# Altium PCB CANLink_V2.PcbDoc (part 1 of 3)
Units mm, origin at the board's own origin, x right, y up, seen from the top; angles counter-clockwise.
Board outline 75 x 56 mm, 2 copper layers (Top Layer, Bottom Layer); 205 components, 140 nets, 648 pads, 309 vias.
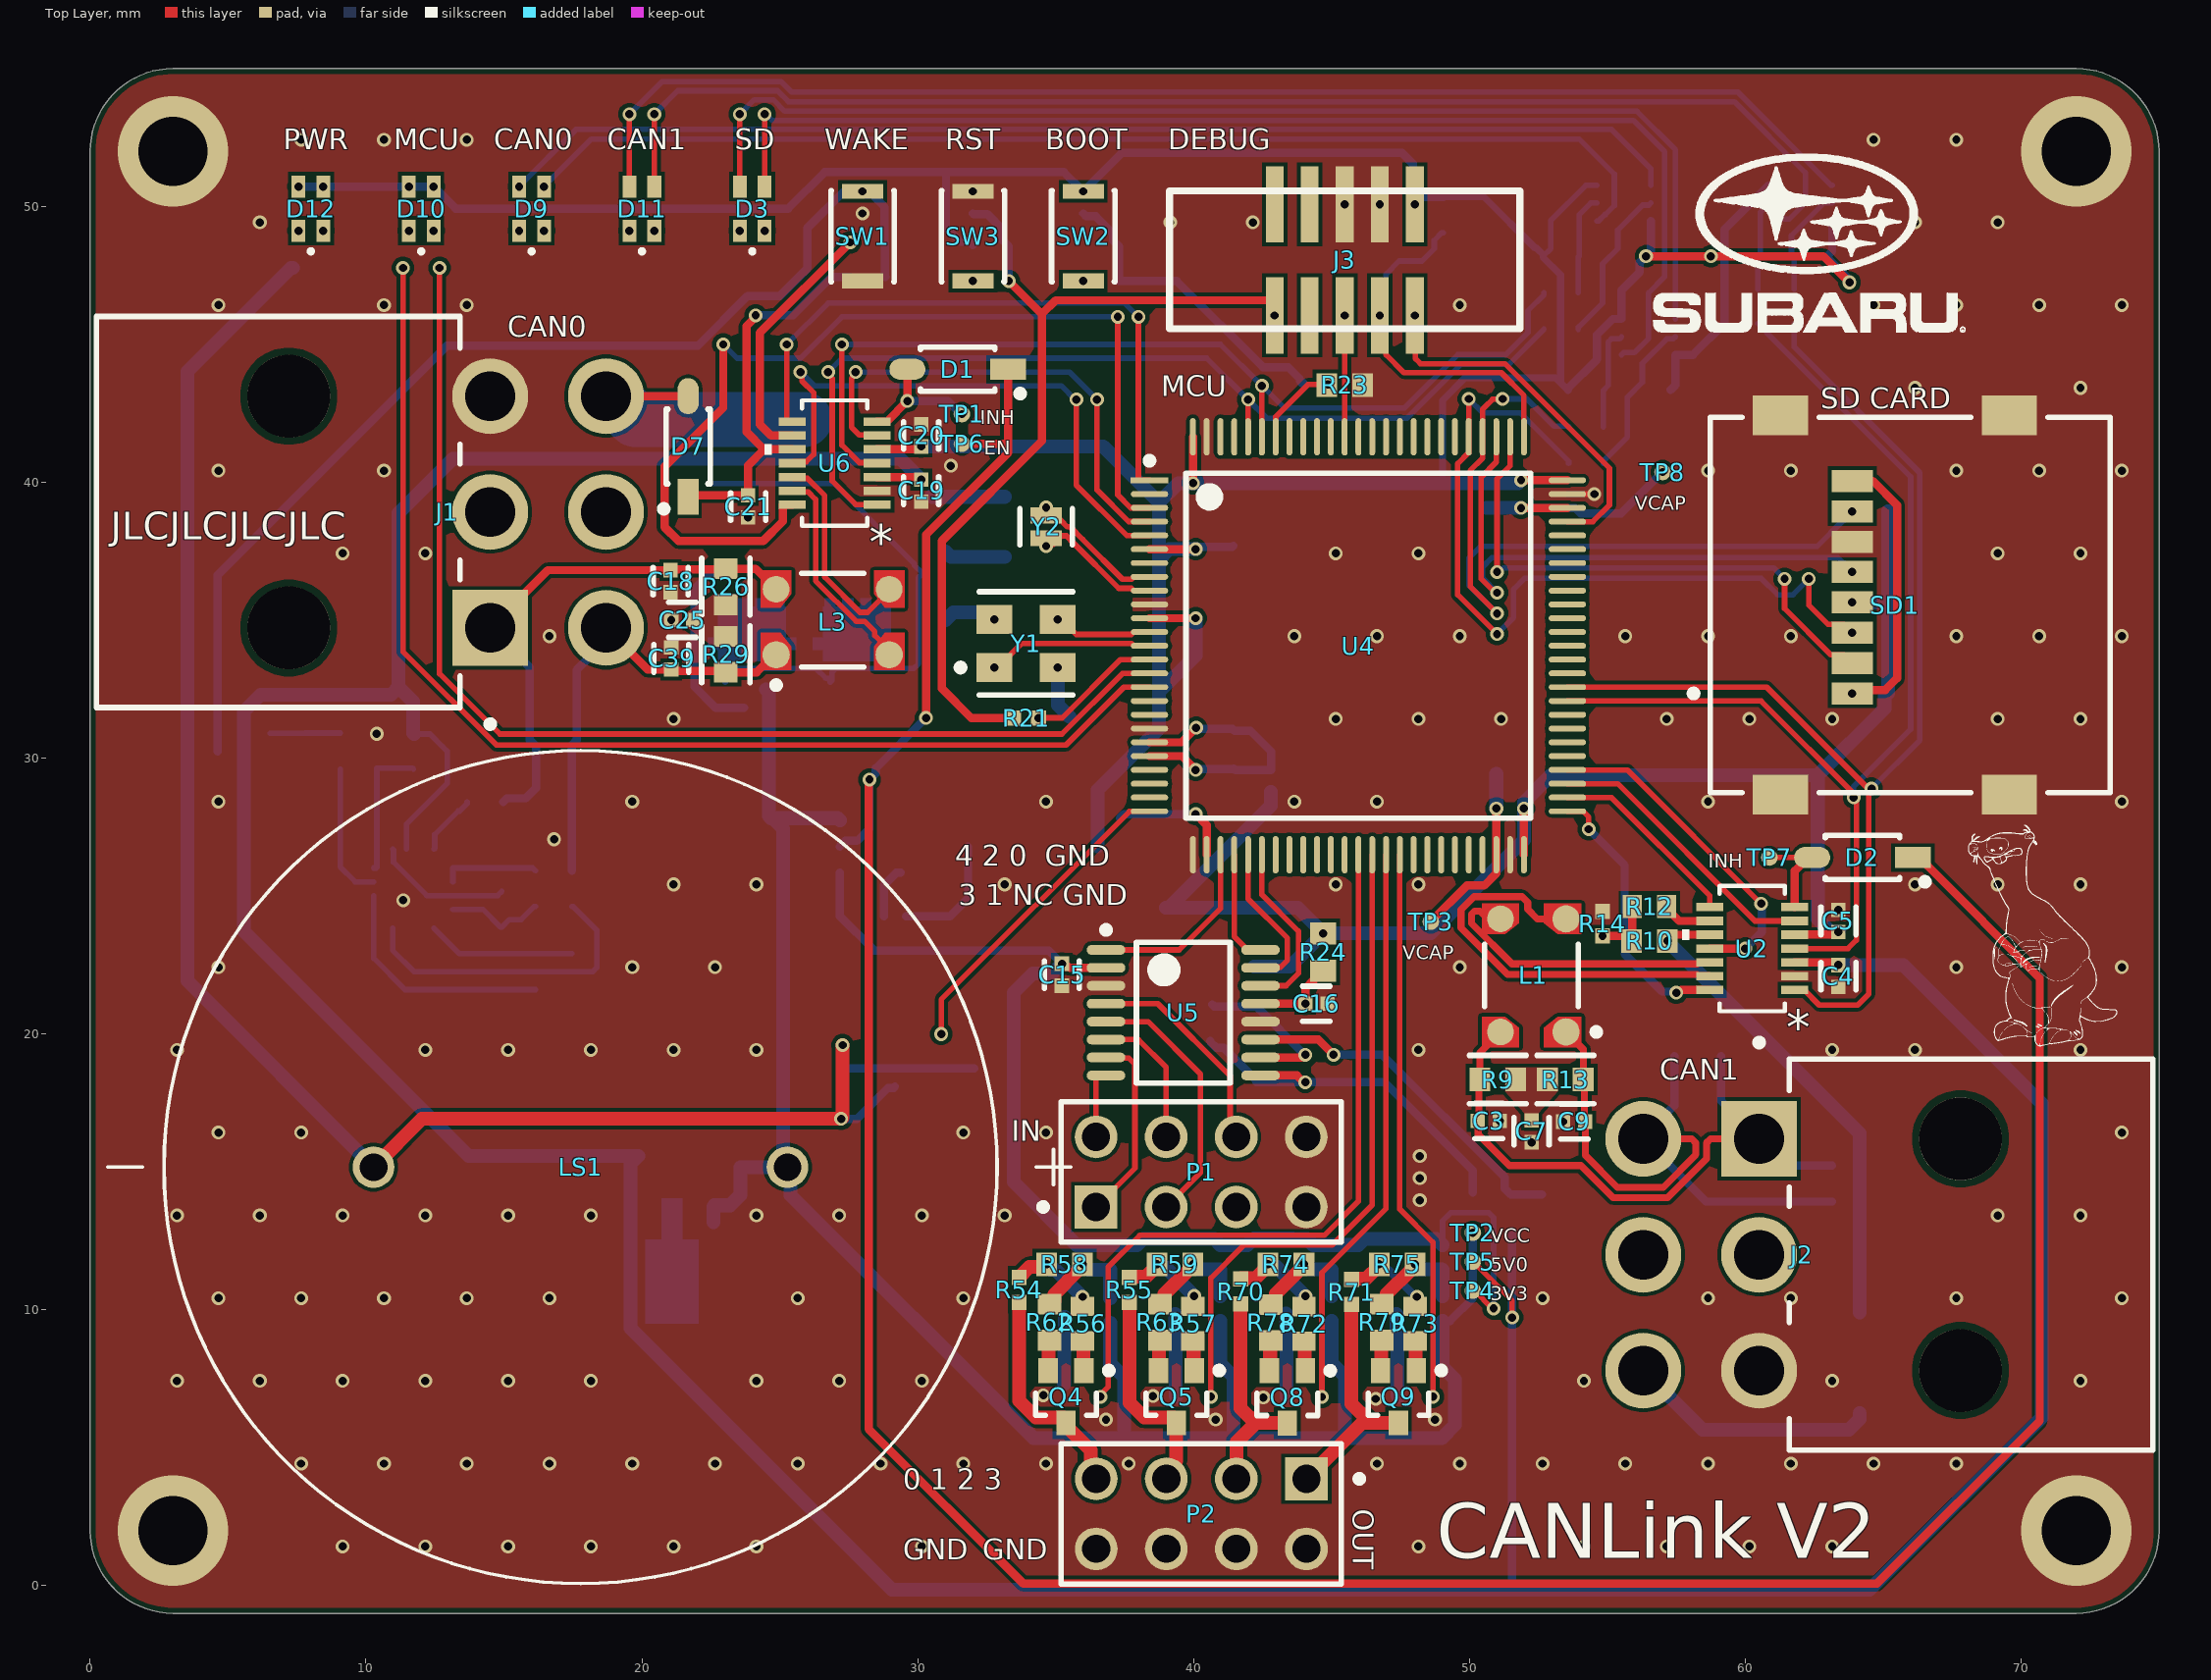
[diagram p0: Top Layer view]
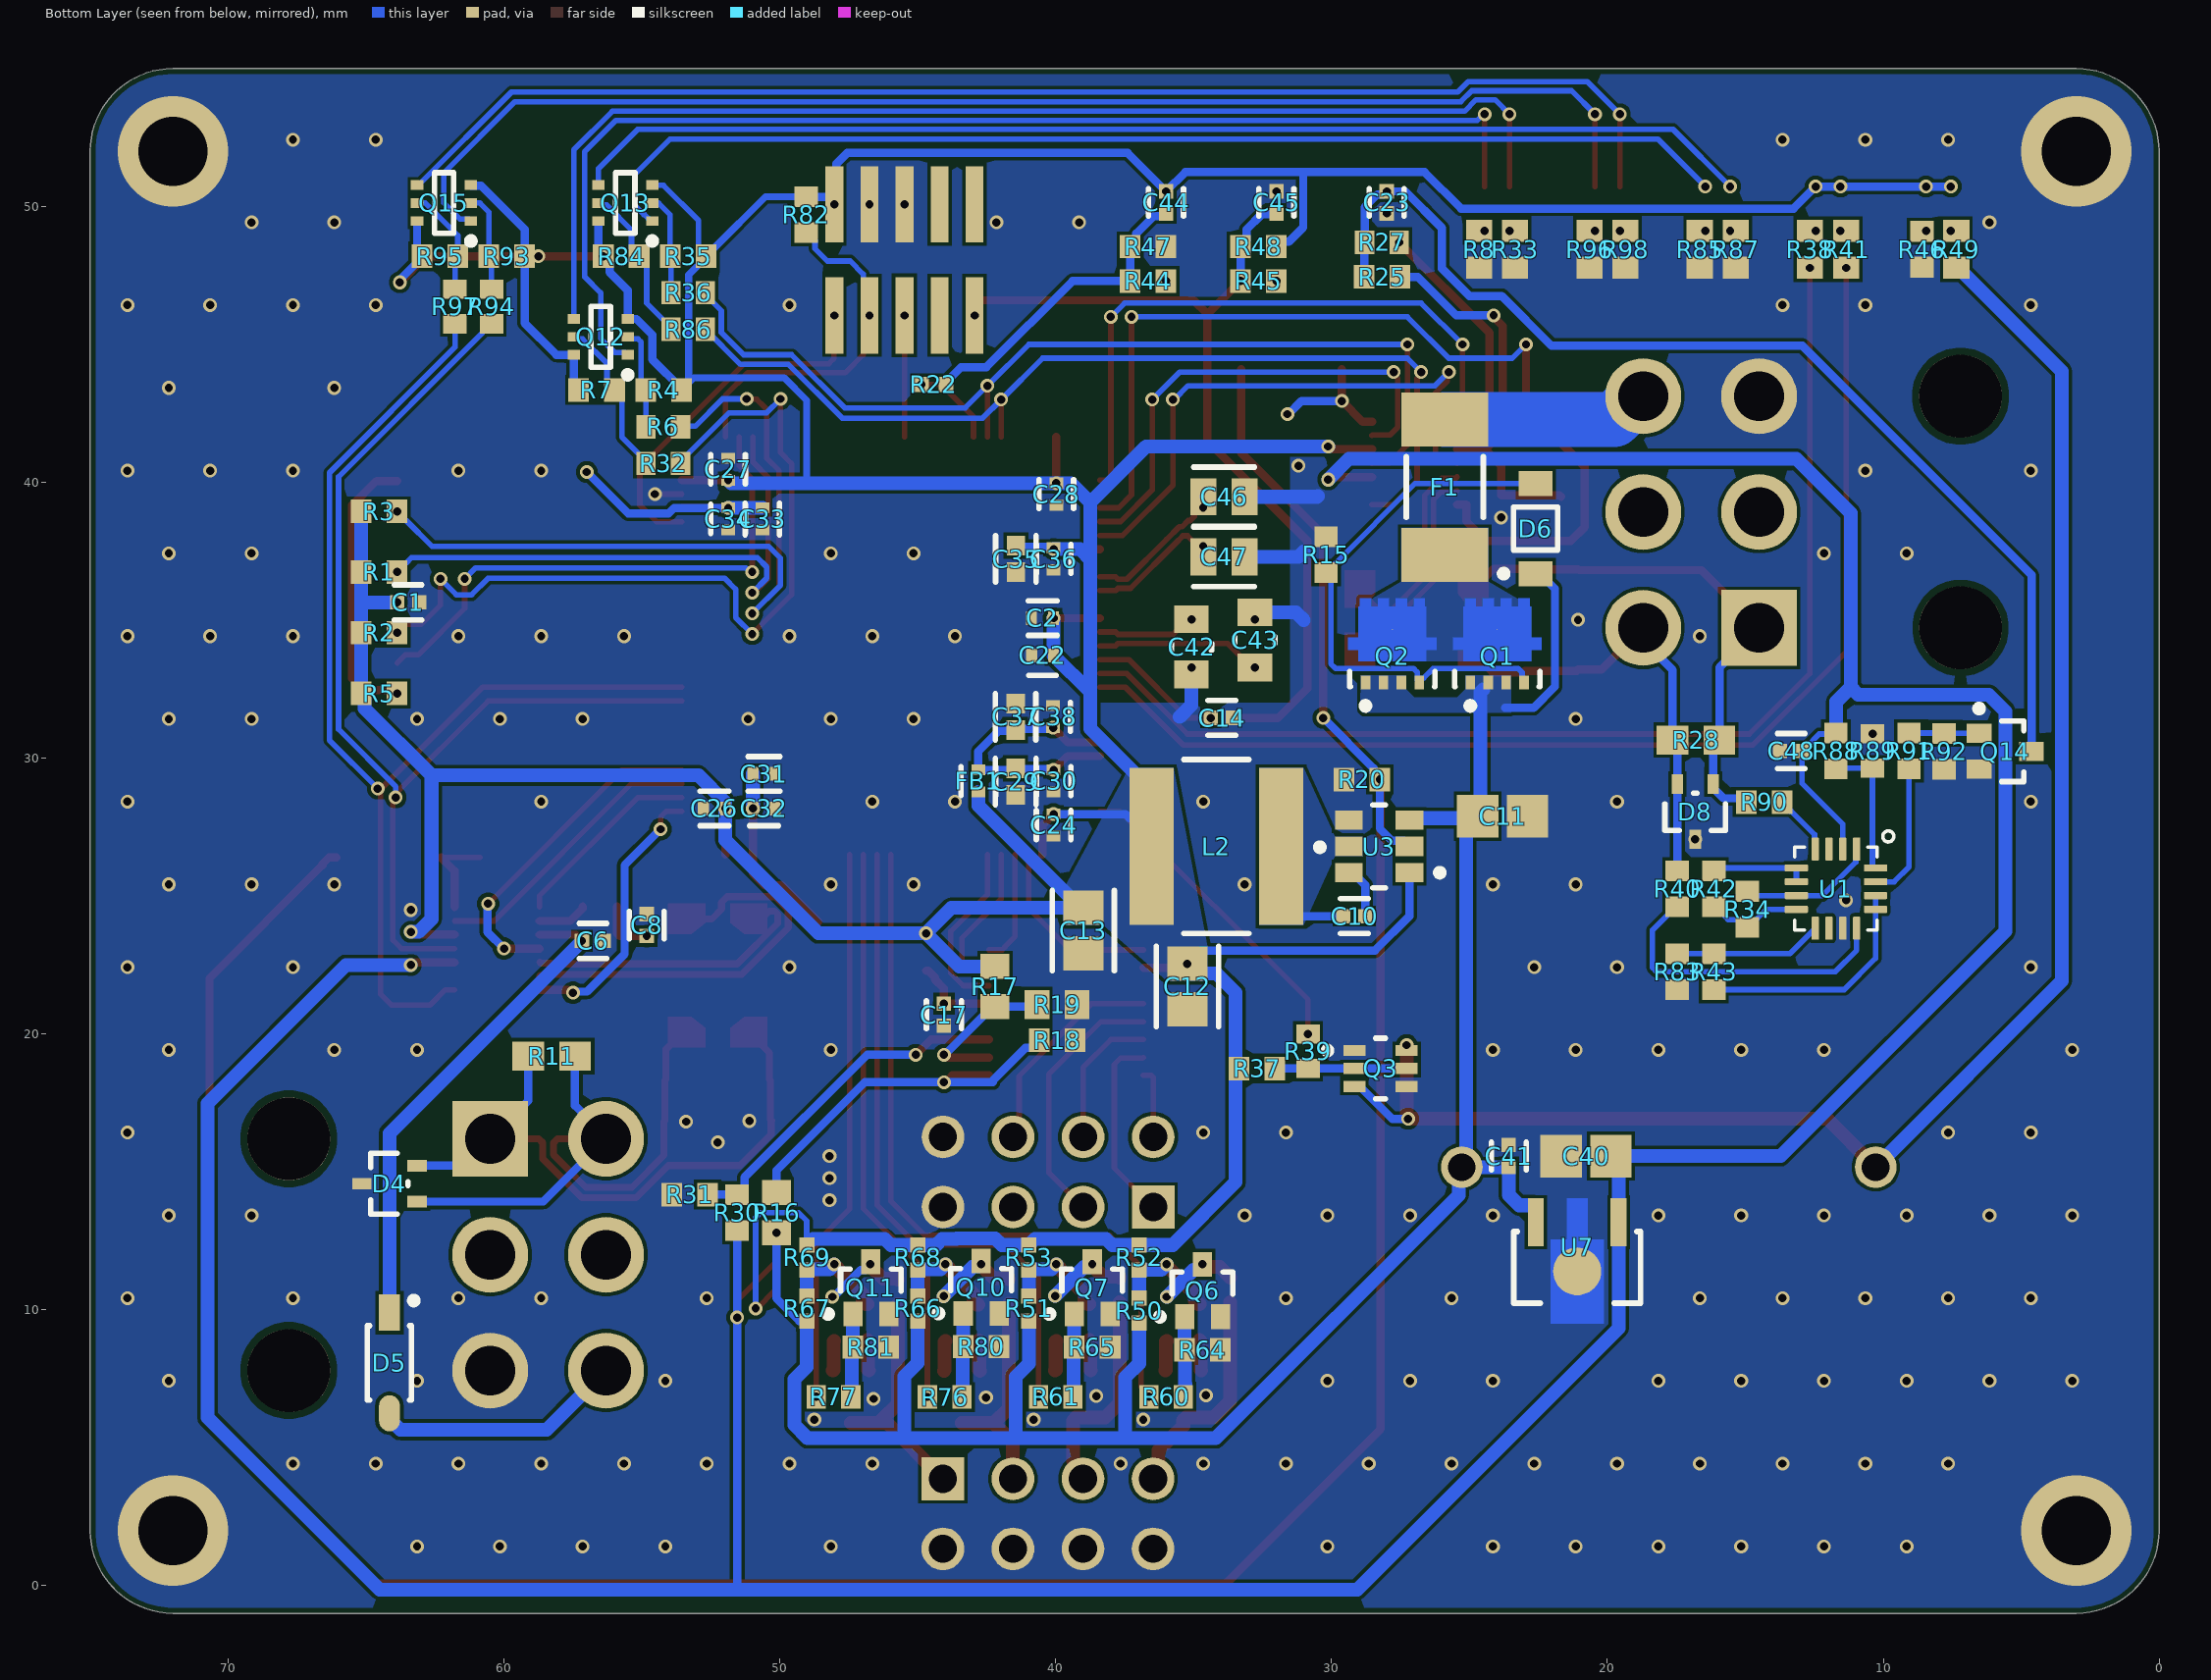
[diagram p1: Bottom Layer view, seen from below]
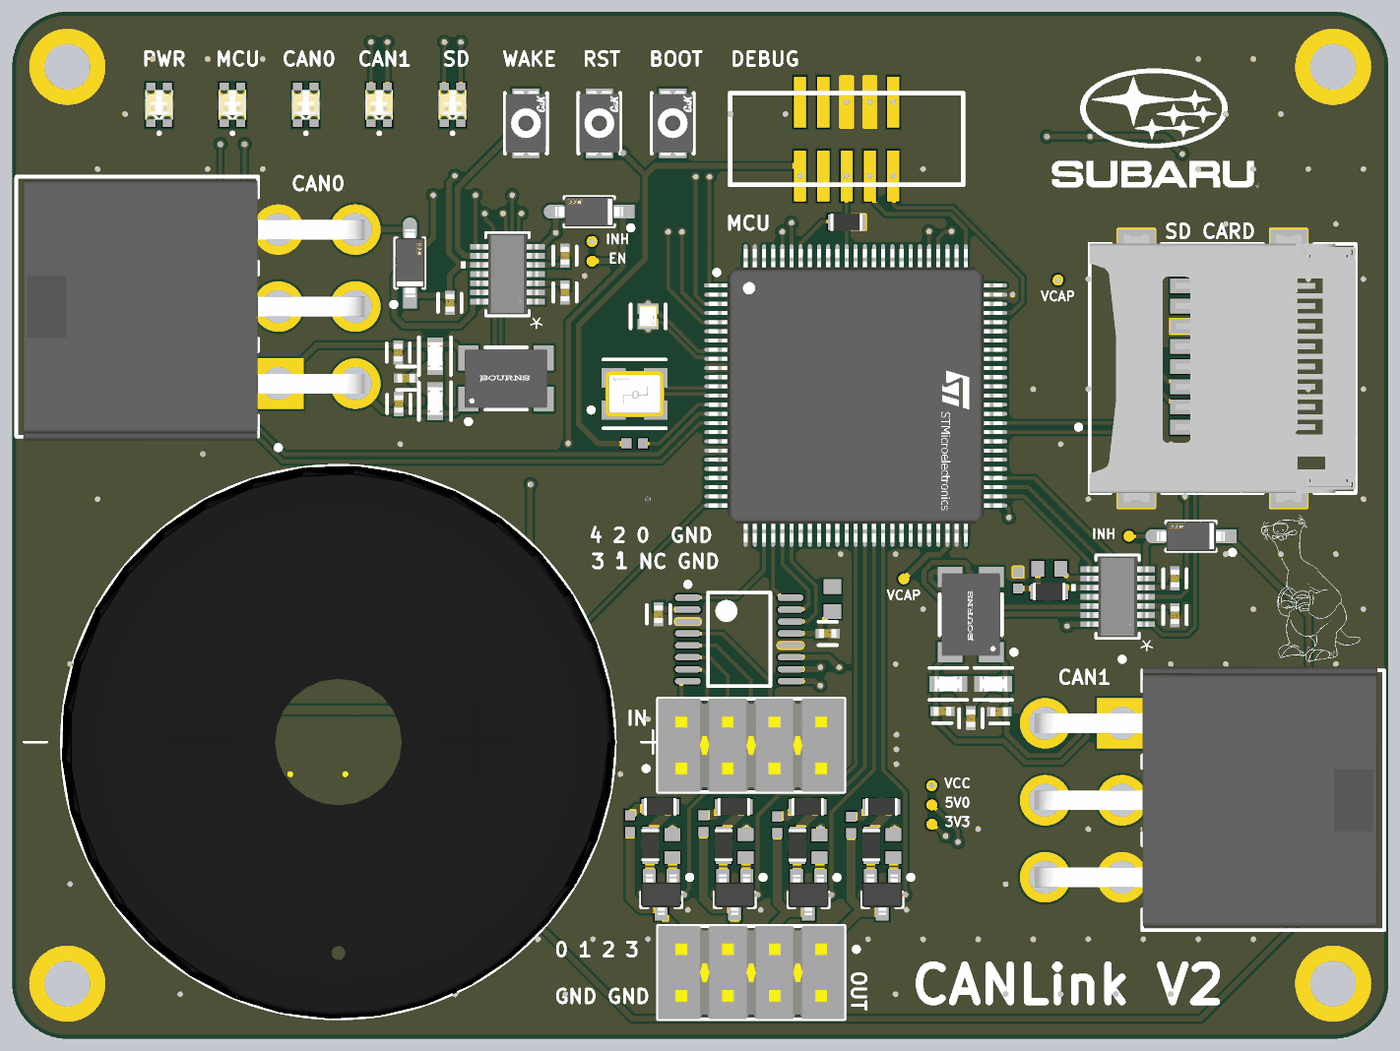
[diagram p3: 3D render of the assembled board from above, using the file's embedded part models]
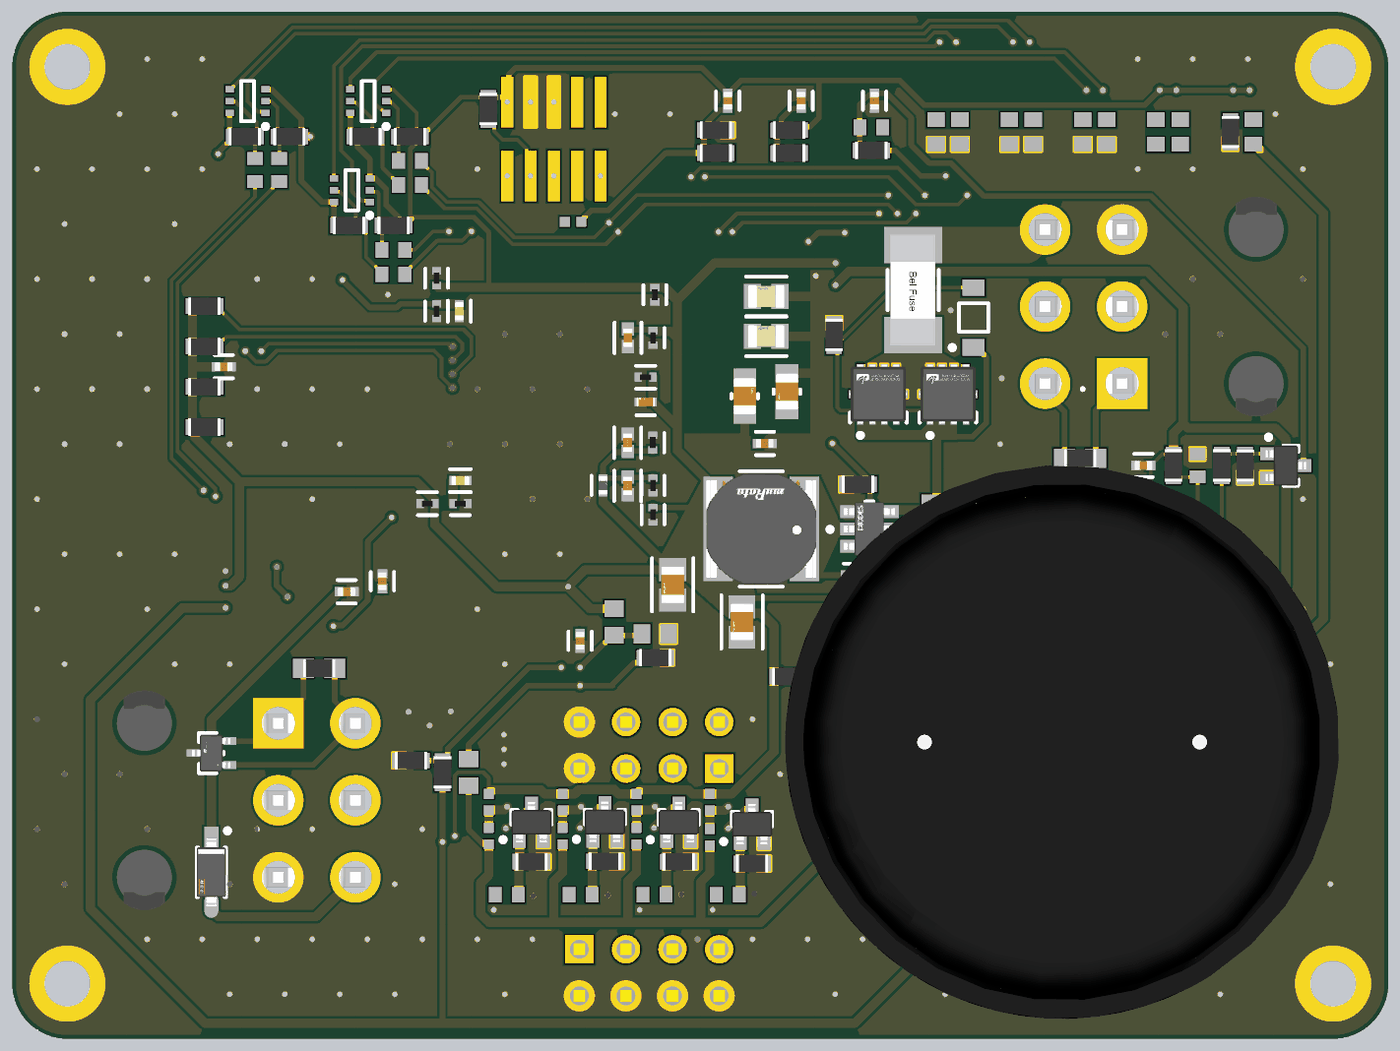
[diagram p4: 3D render of the assembled board from below, using the file's embedded part models]

## Layer stack, top to bottom
Top Solder: solder mask 0.0102, Solder Resist, Dk 3.5
Top Layer: signal copper 0.0356
Dielectric 1: dielectric 0.32, FR-4, Dk 4.8
Bottom Layer: signal copper 0.0356
Bottom Solder: solder mask 0.0102, Solder Resist, Dk 3.5

## Board outline
3,-1 cw(c3,2) 0,2 0,52 cw(c3,52) 3,55 72,55 cw(c72,52) 75,52 75,2 cw(c72,2) 72,-1

## Design rules (kind name [scope] priority, off if disabled: settings)
BoardOutlineClearance [All] p1: gap=0.2 ignorepadtopadclearanceinfootprint=FALSE
Clearance [All] p1: gap=0.127 ignorepadtopadclearanceinfootprint=FALSE except(0.25: Arc-Hole Track-Hole SMDPad-Hole THPad-Hole Via-Hole Fill-Hole Poly-Hole Region-Hole Text-Hole)
ComponentClearance [All] p1: gap=0.127 collisioncheckmode=3 verticalgap=0.127 showdistances=TRUE
DiffPairsRouting [All] p1: maxlimit=0.254 minlimit=0.127 mostfreqgap=0.127 toplayer_minwidth=0.127 toplayer_maxwidth=25.4 toplayer_prefwidth=0.127 bottomlayer_minwidth=0.127 bottomlayer_maxwidth=25.4 bottomlayer_prefwidth=0.127 maxuncoupledlength=12.7
Height [All] p1: minheight=0 maxheight=1816.048 prefheight=12.7
HoleSize [All] p1: absolutevalues=TRUE maxlimit=6.3 minlimit=0.3 maxpercent=80.000 minpercent=20.000
HoleToHoleClearance [All] p1: gap=0.25 allowstackedmicrovias=FALSE
MinimumAnnularRing [All] p1: minimumring=0.076
MinimumSolderMaskSliver [All] p1: minsoldermaskwidth=0
PlaneClearance [All] p1: clearance=0.127
PlaneConnect PlaneConnectPowerPads [InPadClass('PowerPads')] p1: planeconnectstyle=Direct reliefexpansion=0.508 reliefentries=4 reliefconductorwidth=0.254 reliefairgap=0.254
PlaneConnect [All] p2: pad.planeconnectstyle=Relief pad.reliefexpansion=0.3 pad.reliefentries=4 pad.reliefconductorwidth=0.127 pad.reliefairgap=0.127 via.planeconnectstyle=Direct via.reliefexpansion=0.3 via.reliefentries=4 via.reliefconductorwidth=0.127 via.reliefairgap=0.127
PolygonConnect PolygonConnectPowerPads [All vs (InPadClass('PowerPads'))] p1: connectstyle=Direct reliefconductorwidth=0.254 reliefentries=4 polygonreliefangle="90 Angle" airgapwidth=0.254
PolygonConnect [All] p2: connectstyle=Direct reliefconductorwidth=0.127 reliefentries=4 polygonreliefangle="90 Angle" airgapwidth=0.127
RoutingVias [All] p1: holewidth=0.3 width=0.5 viastyle="Through Hole" minholewidth=0.3 minwidth=0.6 maxholewidth=0.6 maxwidth=6.6
SilkToSilkClearance [All] p1: silktosilkclearance=0
SilkToSolderMaskClearance [IsPad] p1: minsilkscreentomaskgap=0.127 clearancetoexposedcopper=TRUE
SolderMaskExpansion [All] p1: expansion=0.075 istentingtop=FALSE
Width [All] p1: maxlimit=25.4 minlimit=0.127 preferedwidth=0.127 minimp=50.000000 maximp=50.000000 favimp=50.000000
20 further rules are at their usual default settings.

## Classes and differential pairs
net class 120DIFF: CAN0_N CAN0_P CAN1_N CAN1_P PRE_CAN1_N PRE_CAN1_P PRE_CAN_N PRE_CAN_P
component class SWITCHES: Q4 Q5 Q6 Q7 Q8 Q9 Q10 Q11 R50 R51 R52 R53 R54 R55 R56 R57 R58 R59 R60 R61 R62 R63 R64 R65 R66 R67 R68 R69 R70 R71 R72 R73 R74 R75 R76 R77 R78 R79 R80 R81
component class SD_0: C1 R1 R2 R3 R5 SD1
component class PWR_MGMT: C10 C11 C12 C13 D6 F1 L2 Q1 Q2 R15 R16 R17 R18 R19 R20 U3
component class MCU_0: C2 C14 C15 C16 C17 C18 C19 C20 C21 C22 C23 C24 C25 C26 C27 C28 C29 C30 C31 C32 C33 C34 C35 C36 C37 C38 C39 C40 C41 C42 C43 C44 C45 C46 C47 C48 D3 D7 D8 D9 D10 D11 D12 FB1 J3 L3 LS1 Q3 Q12 Q13 Q14 Q15 R4 R6 R7 R8 R21 R22 R23 R24 R25 R26 R27 R28 R29 R30 R31 R32 R33 R34 R35 R36 R37 R38 R39 R40 R41 R42 R43 R44 R45 R46 R47 R48 R49 R82 R83 R84 R85 R86 R87 R88 R89 R90 R91 R92 R93 R94 R95 R96 R97 R98 SW1 SW2 SW3 TP3 TP8 U1 U4 U5 U6 U7 Y1 Y2
component class CANLink: D1 D2 J1 J2 P1 P2 TP1 TP2 TP4 TP5 TP6 TP7
component class CAN_1: C3 C4 C5 C6 C7 C8 C9 D4 D5 L1 R9 R10 R11 R12 R13 R14 U2
differential pair PRE_CAN: +PRE_CAN_P -PRE_CAN_N
differential pair PRE_CAN1: +PRE_CAN1_P -PRE_CAN1_N
differential pair X: +X_P -X_N
differential pair X32: +X32_P -X32_N
differential pair CAN1: +CAN1_P -CAN1_N
differential pair CAN0: +CAN0_P -CAN0_N

## Components (designator, comment, footprint, x,y, rotation, side; value= is the part's Value field where it differs from the comment)
C1 "C0402C104K8PACTU" FP-C0402-BB-MFG 63.475,35.648 r180 bottom value="0.10 μF"
C2 "GRM155R71C104KA88D" FP-GRM15-MFG 40.477,35.075 r180 bottom value=0.10μF
C3 "C0402C104K8PACTU" FP-C0402-BB-MFG 50.7,16.85 r0 top value="0.10 μF"
C4 "C0402C104K8PACTU" FP-C0402-BB-MFG 63.375,22.1 r90 top value="0.10 μF"
C5 "C0402C104K8PACTU" FP-C0402-BB-MFG 63.375,24.1 r270 top value="0.10 μF"
C6 "C0402C104K8PACTU" FP-C0402-BB-MFG 56.775,23.375 r0 bottom value="0.10 μF"
C7 "C0402C104K8PACTU" FP-C0402-BB-MFG 52.25,16.475 r270 top value="0.10 μF"
C8 "C0402C104K8PACTU" FP-C0402-BB-MFG 54.825,23.95 r270 bottom value="0.10 μF"
C9 "C0402C104K8PACTU" FP-C0402-BB-MFG 53.8,16.825 r0 top value="0.10 μF"
C10 "C0402C104K8PACTU" FP-C0402-BB-MFG 29.175,24.275 r0 bottom value="0.10 μF"
C11 "C0805C225K9PACTU" CAPC2013X145X50ML20T25 23.8,27.9 r0 bottom
C12 "GRM21BR61E226ME44L" FP-GRM21B-0_2-e0_2_0_7-IPC_B 35.225,21.724 r270 bottom
C13 "GRM21BR61E226ME44L" FP-GRM21B-0_2-e0_2_0_7-IPC_B 39,23.75 r270 bottom
C14 "C0402C104K8PACTU" FP-C0402-BB-MFG 33.975,31.462 r180 bottom value="0.10 μF"
C15 "C0402C104K8PACTU" FP-C0402-BB-MFG 35.225,22.15 r270 top value="0.10 μF"
C16 "C0402C104K8PACTU" FP-C0402-BB-MFG 44.45,21.1 r0 top value="0.10 μF"
C17 "C0402C104K8PACTU" FP-C0402-BB-MFG 44.05,20.7 r270 bottom value="0.10 μF"
C18 "C0402C104K8PACTU" FP-C0402-BB-MFG 21.04,36.417 r270 top value="0.10 μF"
C19 "C0402C104K8PACTU" FP-C0402-BB-MFG 30.125,39.7 r90 top value="0.10 μF"
C20 "C0402C104K8PACTU" FP-C0402-BB-MFG 30.125,41.7 r270 top value="0.10 μF"
C21 "C0402C104K8PACTU" FP-C0402-BB-MFG 23.85,39.125 r90 top value="0.10 μF"
C22 "C1005X5R1A475K050BC" FP-C1005-050-0_15-MFG 40.475,33.725 r0 bottom
C23 "C0402C104K8PACTU" FP-C0402-BB-MFG 28,50.15 r90 bottom value="0.10 μF"
C24 "GRM155R71C104KA88D" FP-GRM15-MFG 40.075,27.575 r90 bottom value=0.10μF
C25 "C0402C104K8PACTU" FP-C0402-BB-MFG 21.465,35.017 r180 top value="0.10 μF"
C26 "GRM155R71C104KA88D" FP-GRM15-MFG 52.375,28.177 r180 bottom value=0.10μF
C27 "GRM155R71C104KA88D" FP-GRM15-MFG 51.873,40.475 r270 bottom value=0.10μF
C28 "GRM155R71C104KA88D" FP-GRM15-MFG 39.975,39.573 r90 bottom value=0.10μF
C29 "EMK105BJ105KV-F" FP-0402-L_1_0_0_05-W_0_5-IPC_A 41.452,29.15 r270 bottom
C30 "GRM155R71C104KA88D" FP-GRM15-MFG 40.077,29.175 r90 bottom value=0.10μF
C31 "C1005X7S1A225K050BC" FP-C1005-050-0_15-0_1-MFG 50.575,29.434 r0 bottom
C32 "GRM155R71C104KA88D" FP-GRM15-MFG 50.575,28.177 r0 bottom value=0.10μF
C33 "C1005X7S1A225K050BC" FP-C1005-050-0_15-0_1-MFG 50.634,38.674 r90 bottom
C34 "GRM155R71C104KA88D" FP-GRM15-MFG 51.873,38.675 r90 bottom value=0.10μF
C35 "EMK105BJ105KV-F" FP-0402-L_1_0_0_05-W_0_5-IPC_A 41.441,37.226 r270 bottom
C36 "GRM155R71C104KA88D" FP-GRM15-MFG 40.077,37.225 r90 bottom value=0.10μF
C37 "EMK105BJ105KV-F" FP-0402-L_1_0_0_05-W_0_5-IPC_A 41.454,31.5 r90 bottom
C38 "GRM155R71C104KA88D" FP-GRM15-MFG 40.09,31.504 r270 bottom value=0.10μF
C39 "C0402C104K8PACTU" FP-C0402-BB-MFG 21.065,33.617 r270 top value="0.10 μF"
C40 "C0805C225K9PACTU" CAPC2013X145X50ML20T25 20.775,15.575 r180 bottom
C41 "C0402C104K8PACTU" FP-C0402-BB-MFG 23.575,15.575 r270 bottom value="0.10 μF"
C42 "08051A6R8CAT2A" FP-0805-L_2_01_0_2-W_1_25-MFG 35.075,34.037 r90 bottom
C43 "08051A6R8CAT2A" FP-0805-L_2_01_0_2-W_1_25-MFG 32.775,34.287 r270 bottom
C44 "C0402C104K8PACTU" FP-C0402-BB-MFG 36,50.15 r90 bottom value="0.10 μF"
C45 "C0402C104K8PACTU" FP-C0402-BB-MFG 32,50.15 r90 bottom value="0.10 μF"
C46 "C0805C180J5GACTU" FP-C0805C-DN-MFG 33.9,39.478 r180 bottom value="18 pF"
C47 "C0805C180J5GACTU" FP-C0805C-DN-MFG 33.9,37.303 r180 bottom value="18 pF"
C48 "C0402C104K8PACTU" FP-C0402-BB-MFG 13.34,30.26 r0 bottom value="0.10 μF"
D1 "1N4148W-TP" FP-SOD-123-IPC_A 31.45,44.1 r180 top
D2 "1N4148W-TP" FP-SOD-123-IPC_A 64.25,26.4 r180 top
D3 "150066RG54050" WL-SBCD_0606 24,49.925 r180 top
D4 "ESDCAN02-2BWY" FP-SOT323-3L-MFG 64.15,14.575 r0 bottom value=3pF
D5 "1N4148W-TP" FP-SOD-123-IPC_A 64.15,8.075 r270 bottom
D6 "MMSZ5242BT1G" ONSC-SOD-123-2-425-04_V 22.6,38.325 r90 bottom
D7 "1N4148W-TP" FP-SOD-123-IPC_A 21.675,41.3 r90 top
D8 "ESDCAN02-2BWY" FP-SOT323-3L-MFG 16.815,28.06 r270 bottom value=3pF
D9 "150066RG54050" WL-SBCD_0606 16,49.925 r180 top
D10 "150066RG54050" WL-SBCD_0606 12,49.925 r180 top
D11 "150066RG54050" WL-SBCD_0606 20,49.925 r180 top
D12 "150066RG54050" WL-SBCD_0606 8,49.925 r180 top
F1 "0679L1000-05" FP-0679L-MFG 25.894,39.827 r270 bottom value=0.0038Ω
FB1 "BLM15PX601SN1D" FP-BLM15-0_05-MFG 42.802,29.175 r90 bottom
J1 "455580003" FP-455580003-MFG 7,38.925 r90 top
J2 "455580003" FP-455580003-MFG 68,12 r270 top
J3 "HYDRA_PROGRAMMING_HEADER" 3220-10-0300-00-Footprint-1 48.02,46.05 r180 top
L1 "SRF4532-510Y" FP-SRF4532-MFG 52.25,22.125 r90 top
L2 "1255AY-3R9N=P3" FP-DG6045C-MFG 34.175,26.8 r0 bottom
L3 "SRF4532-510Y" FP-SRF4532-MFG 26.915,35 r0 top
LS1 "AI-3035-TT-12V-R" AI-3035-TT-12V-R-Footprint-1 17.775,15.175 r180 top
P1 "TSW-104-08-L-D" SMTC-TSW-104-08-L-D_V 40.275,15 r0 top
P2 "TSW-104-08-L-D" SMTC-TSW-104-08-L-D_V 40.28,2.605 r180 top
Q1 "SISH615ADN-T1-GE3" SISH615ADN-T1-GE3-Footprint-1 24.032,34.149 r180 bottom
Q2 "SISH615ADN-T1-GE3" SISH615ADN-T1-GE3-Footprint-1 27.832,34.149 r180 bottom
Q3 "SSM6N7002KFU,LF" FP-SSOP6-P-0_65A-MFG 28.225,18.75 r180 bottom
Q4 "DMG1013UW-7" DIOD-SOT323-3_V 35.375,6.85 r270 top
Q5 "DMG1013UW-7" DIOD-SOT323-3_V 39.375,6.85 r270 top
Q6 "BSS138W-7-F" DIOD-SOT323-3_V 34.675,10.7 r90 bottom
Q7 "BSS138W-7-F" DIOD-SOT323-3_V 38.675,10.8 r90 bottom
Q8 "DMG1013UW-7" DIOD-SOT323-3_V 43.4,6.844 r270 top
Q9 "DMG1013UW-7" DIOD-SOT323-3_V 47.425,6.85 r270 top
Q10 "BSS138W-7-F" DIOD-SOT323-3_V 42.7,10.819 r90 bottom
Q11 "BSS138W-7-F" DIOD-SOT323-3_V 46.7,10.8 r90 bottom
Q12 "BSS84AKS,115" NXP-SOT363_L 56.491,45.275 r0 bottom
Q13 "BSS84AKS,115" NXP-SOT363_L 55.6,50.125 r0 bottom
Q14 "BSS138W-7-F" DIOD-SOT323-3_V 5.575,30.25 r180 bottom
Q15 "BSS84AKS,115" NXP-SOT363_L 62.175,50.125 r0 bottom
R1 "ERJ3EKF1002V" RESC1609X55X30LL15T15 64.525,36.748 r0 bottom
R2 "ERJ3EKF1002V" RESC1609X55X30LL15T15 64.525,34.548 r0 bottom
R3 "ERJ3EKF1002V" RESC1609X55X30LL15T15 64.525,38.948 r0 bottom
R4 "ERJ3EKF1002V" RESC1609X55X30LL15T15 54.216,43.35 r180 bottom
R5 "ERJ3EKF1002V" RESC1609X55X30LL15T15 64.525,32.348 r0 bottom
R6 "ERJ-3EKF1001V" RESC1608X55X30LL15T15#1 54.225,42.013 r0 bottom
R7 "ERJ3EKF1002V" RESC1609X55X30LL15T15 56.641,43.35 r0 bottom
R8 "ERJ3EKF56R0V" RESC1608X55X30NL15T15 24.65,48.45 r90 bottom
R9 "ERJ-3EKF60R4V" FP-ERJ3EK-IPC_C 51.025,18.35 r0 top
R10 "ERJ3EKF1002V" RESC1609X55X30LL15T15 56.525,23.375 r180 top
R11 "ERJ-3EKF1200V" RESC1609X55X30ML15T15 58.275,19.2 r180 bottom
R12 "ERJ-3EKF1001V" RESC1608X55X30LL15T15#1 56.525,24.625 r180 top
R13 "ERJ-3EKF60R4V" FP-ERJ3EK-IPC_C 53.475,18.35 r0 top
R14 "0402 JUMPER 0 OHM" RESC1005X40X25NL05T05 54.825,24 r270 top
R15 "ERJ3EKF1002V" RESC1609X55X30LL15T15 30.2,37.375 r90 bottom
R16 "ERJ-3EKF1003V" RESC1608X55X30ML15T15 50.125,13.525 r270 bottom
R17 "ERJ-3EKF1003V" RESC1608X55X30ML15T15 42.2,21.725 r90 bottom
R18 "ERJ3EKF1002V" RESC1609X55X30LL15T15 39.95,19.775 r180 bottom
R19 "ERJ-3EKF1003V" RESC1608X55X30ML15T15 39.95,21.075 r0 bottom
R20 "ERJ3EKF1002V" RESC1609X55X30LL15T15 28.9,29.225 r0 bottom
R21 "0402 JUMPER 0 OHM" RESC1005X40X25NL05T05 33.925,31.462 r180 top
R22 "0402 JUMPER 0 OHM" RESC1005X40X25NL05T05 44.425,43.55 r180 bottom
R23 "ERJ3EKF1002V" RESC1609X55X30LL15T15 45.48,43.525 r180 top
R24 "ERJ3EKF56R0V" RESC1608X55X30NL15T15 44.7,22.975 r270 top
R25 "ERJ3EKF1002V" RESC1609X55X30LL15T15 28.175,47.45 r0 bottom
R26 "ERJ-3EKF60R4V" FP-ERJ3EK-IPC_C 23.04,36.217 r270 top
R27 "ERJ-3EKF1001V" RESC1608X55X30LL15T15#1 28.175,48.7 r0 bottom
R28 "ERJ-3EKF1200V" RESC1609X55X30ML15T15 16.79,30.66 r0 bottom
R29 "ERJ-3EKF60R4V" FP-ERJ3EK-IPC_C 23.04,33.767 r270 top
R30 "ERJ3EKF1002V" RESC1609X55X30LL15T15 51.55,13.525 r270 bottom
R31 "ERJ3EKF1002V" RESC1609X55X30LL15T15 53.275,14.175 r0 bottom
R32 "ERJ-3EKF1001V" RESC1608X55X30LL15T15#1 54.225,40.688 r0 bottom
R33 "ERJ3EKF56R0V" RESC1608X55X30NL15T15 23.35,48.45 r90 bottom
R34 "ERJ3EKF1002V" RESC1609X55X30LL15T15 14.925,24.525 r90 bottom
R35 "ERJ3EKF1002V" RESC1609X55X30LL15T15 53.325,48.2 r180 bottom
R36 "ERJ-3EKF1001V" RESC1608X55X30LL15T15#1 53.325,46.875 r0 bottom
R37 "ERJ3EKF1002V" RESC1609X55X30LL15T15 32.7,18.75 r0 bottom
R38 "ERJ3EKF56R0V" RESC1608X55X30NL15T15 12.664,48.45 r90 bottom
R39 "ERJ-3EKF1001V" RESC1608X55X30LL15T15#1 30.85,19.375 r270 bottom
R40 "ERJ3EKF1002V" RESC1609X55X30LL15T15 17.465,25.27 r270 bottom
R41 "ERJ3EKF56R0V" RESC1608X55X30NL15T15 11.339,48.45 r90 bottom
R42 "ERJ3EKF1002V" RESC1609X55X30LL15T15 16.14,25.27 r270 bottom
R43 "ERJ3EKF1002V" RESC1609X55X30LL15T15 16.14,22.26 r90 bottom
R44 "ERJ-3EKF3300V" RESC1608X55X30LL15T15#2 36.65,47.3 r180 bottom
R45 "ERJ-3EKF3300V" RESC1608X55X30LL15T15#2 32.65,47.3 r180 bottom
R46 "ERJ-3EKF3300V" RESC1608X55X30LL15T15#2 8.6,48.45 r270 bottom
R47 "ERJ3EKF1002V" RESC1609X55X30LL15T15 36.65,48.55 r0 bottom
R48 "ERJ3EKF1002V" RESC1609X55X30LL15T15 32.65,48.55 r0 bottom
R49 "ERJ3EKF56R0V" RESC1608X55X30NL15T15 7.35,48.45 r90 bottom
R50 "0402 JUMPER 0 OHM" RESC1005X40X25NL05T05 36.975,9.975 r90 bottom
R51 "0402 JUMPER 0 OHM" RESC1005X40X25NL05T05 40.975,10.05 r90 bottom
R52 "0402 JUMPER 0 OHM" RESC1005X40X25NL05T05 36.975,11.9 r270 bottom
R53 "0402 JUMPER 0 OHM" RESC1005X40X25NL05T05 40.975,11.9 r270 bottom
R54 "0402 JUMPER 0 OHM" RESC1005X40X25NL05T05 33.675,10.725 r270 top
R55 "0402 JUMPER 0 OHM" RESC1005X40X25NL05T05 37.675,10.725 r270 top
R56 "ERJ-3EKF1001V" RESC1608X55X30LL15T15#1 35.975,9.5 r270 top
R57 "ERJ-3EKF1001V" RESC1608X55X30LL15T15#1 39.975,9.5 r270 top
R58 "ERJ3EKF1002V" RESC1609X55X30LL15T15 35.325,11.65 r0 top
R59 "ERJ3EKF1002V" RESC1609X55X30LL15T15 39.325,11.65 r0 top
R60 "ERJ-3EKF1001V" RESC1608X55X30LL15T15#1 36,6.85 r180 bottom
R61 "ERJ-3EKF1001V" RESC1608X55X30LL15T15#1 40,6.85 r180 bottom
R62 "ERJ3EKF1002V" RESC1609X55X30LL15T15 34.775,9.55 r270 top
R63 "ERJ3EKF1002V" RESC1609X55X30LL15T15 38.775,9.55 r270 top
R64 "ERJ3EKF1002V" RESC1609X55X30LL15T15 34.675,8.55 r0 bottom
R65 "ERJ3EKF1002V" RESC1609X55X30LL15T15 38.675,8.65 r0 bottom
R66 "0402 JUMPER 0 OHM" RESC1005X40X25NL05T05 45,10.05 r90 bottom
R67 "0402 JUMPER 0 OHM" RESC1005X40X25NL05T05 49.025,10.05 r90 bottom
R68 "0402 JUMPER 0 OHM" RESC1005X40X25NL05T05 45,11.9 r270 bottom
R69 "0402 JUMPER 0 OHM" RESC1005X40X25NL05T05 49.025,11.9 r270 bottom
R70 "0402 JUMPER 0 OHM" RESC1005X40X25NL05T05 41.7,10.669 r270 top
R71 "0402 JUMPER 0 OHM" RESC1005X40X25NL05T05 45.725,10.65 r270 top
R72 "ERJ-3EKF1001V" RESC1608X55X30LL15T15#1 44,9.494 r270 top
R73 "ERJ-3EKF1001V" RESC1608X55X30LL15T15#1 48.025,9.5 r270 top
R74 "ERJ3EKF1002V" RESC1609X55X30LL15T15 43.35,11.65 r0 top
R75 "ERJ3EKF1002V" RESC1609X55X30LL15T15 47.375,11.65 r0 top
R76 "ERJ-3EKF1001V" RESC1608X55X30LL15T15#1 44.025,6.844 r180 bottom
R77 "ERJ-3EKF1001V" RESC1608X55X30LL15T15#1 48.05,6.85 r180 bottom
R78 "ERJ3EKF1002V" RESC1609X55X30LL15T15 42.8,9.544 r270 top
R79 "ERJ3EKF1002V" RESC1609X55X30LL15T15 46.825,9.55 r270 top
R80 "ERJ3EKF1002V" RESC1609X55X30LL15T15 42.7,8.669 r0 bottom
R81 "ERJ3EKF1002V" RESC1609X55X30LL15T15 46.7,8.65 r0 bottom
R82 "ERJ3EKF1002V" RESC1609X55X30LL15T15 49.05,49.7 r270 bottom
R83 "ERJ3EKF1002V" RESC1609X55X30LL15T15 17.465,22.26 r270 bottom
R84 "ERJ3EKF1002V" RESC1609X55X30LL15T15 55.75,48.2 r0 bottom
R85 "ERJ3EKF56R0V" RESC1608X55X30NL15T15 16.65,48.45 r90 bottom
R86 "ERJ-3EKF1001V" RESC1608X55X30LL15T15#1 53.325,45.55 r0 bottom
R87 "ERJ3EKF56R0V" RESC1608X55X30NL15T15 15.341,48.45 r90 bottom
R88 "ERJ3EKF1002V" RESC1609X55X30LL15T15 11.715,30.26 r90 bottom
R89 "ERJ-3EKF1001V" RESC1608X55X30LL15T15#1 10.39,30.26 r270 bottom
R90 "ERJ3EKF1002V" RESC1609X55X30LL15T15 14.315,28.41 r180 bottom
R91 "ERJ3EKF1002V" RESC1609X55X30LL15T15 9.065,30.26 r270 bottom
R92 "ERJ3EKF1002V" RESC1609X55X30LL15T15 7.8,30.25 r90 bottom
R93 "ERJ3EKF1002V" RESC1609X55X30LL15T15 59.9,48.2 r180 bottom
R94 "ERJ-3EKF1001V" RESC1608X55X30LL15T15#1 60.45,46.375 r90 bottom
R95 "ERJ3EKF1002V" RESC1609X55X30LL15T15 62.325,48.2 r0 bottom
R96 "ERJ3EKF56R0V" RESC1608X55X30NL15T15 20.65,48.45 r90 bottom
R97 "ERJ-3EKF1001V" RESC1608X55X30LL15T15#1 61.775,46.375 r90 bottom
R98 "ERJ3EKF56R0V" RESC1608X55X30NL15T15 19.35,48.45 r90 bottom
SD1 "47219-2001" MOLX-47219-2001-8_V 65.425,35.553 r90 top
SW1 "KXT331LHS" FP-KXT331LHS-MFG 28,48.925 r90 top
SW2 "KXT331LHS" FP-KXT331LHS-MFG 36,48.925 r90 top
SW3 "KXT331LHS" FP-KXT331LHS-MFG 32,48.925 r90 top
TP1 "TPAD6R" TP06R 31.6,42.475 r90 top
TP2 "TPAD6R" TP06R 50.125,12.8 r90 top
TP3 "TPAD6R" TP06R 48.6,24.075 r90 top
TP4 "TPAD6R" TP06R 50.125,10.7 r90 top
TP5 "TPAD6R" TP06R 50.125,11.75 r90 top
TP6 "TPAD6R" TP06R 31.6,41.4 r90 top
TP7 "TPAD6R" TP06R 60.875,26.4 r90 top
TP8 "TPAD6R" TP06R 57,40.375 r90 top
U1 "LM2902Q4T" LM2902Q4T-Footprint-1 11.715,25.27 r270 bottom
U2 "TCAN1146DYYRQ1" TCAN1146DYYRQ1-Footprint-1 60.25,23.1 r180 top
U3 "AP63203WU-7" FP-TSOT26-MFG 28.275,26.8 r0 bottom
U4 "STM32H730VBT6" FP-LQFP100-1L-IPC_C 45.975,34.075 r0 top
U5 "ADC088S022CIMT/NOPB" MTC16_L 39.625,20.775 r0 top
U6 "TCAN1146DYYRQ1" TCAN1146DYYRQ1-Footprint-1 26.99,40.696 r180 top
U7 "AP7381-50Y-13" FP-SOT89-MFG 21.093,11.541 r0 bottom
Y1 "ABM8-48.000MHZ-B2-T" FP-ABM8-MFG 33.925,34.162 r0 top
Y2 "ECS-.327-12.5-1210-TR" FP-ECX-1210-MFG 34.655,38.39 r270 top

## Footprints (in the part's own frame and the unit in brackets; to place one, negate y for a bottom-side part, rotate by r counter-clockwise, add the part's x,y. Pads: shape width x height; smd on the part's side, far side on the other; paste and mask are expansions set on the pad)
3220-10-0300-00-Footprint-1 [mm]
  rect 0.65x2.77 all layers, no hole: 1(0,-4.03) 2(0,0) 3(1.27,-4.03) 4(1.27,0) 5(2.54,-4.03) 6(2.54,0) 7(3.81,-4.03) 8(3.81,0) 9(5.08,-4.03) 10(5.08,0)
  silkscreen extent -3.81,-4.51 8.89,0.49
AI-3035-TT-12V-R-Footprint-1 [mm]
  round 1.508 hole 1: N(7.5,0) P(-7.5,0)
  silkscreen extent -17.78,-15.1 17.14,15.1, body extent -15.1,-15.1 15.1,15.1, height 2.15
CAPC2013X145X50ML20T25 [mm] "Chip Capacitor, 2-Leads, Body 2.00x1.25mm, IPC Low Density"
  rect 1.5x1.55 smd: 1(-0.9,0) 2(0.9,0)
  body extent -1.1,-0.72 1.1,0.72, height 1.45
DIOD-SOT323-3_V [mm] "SOT323, 3-Leads, Body 2.2x1.35mm, Pitch 0.65mm"
  rect 0.9x0.7 smd: 1(-0.95,0.65) 2(-0.95,-0.65) 3(0.95,0)
  silkscreen extent -1.07,-1.1 0.67,1.68, body extent -1.1,-1.1 1.1,1.1, height 1.07
FP-0402-L_1_0_0_05-W_0_5-IPC_A [mm]
  rect 0.715x0.672 smd paste+0 mask+0: 1(-0.479,0) 2(0.479,0)
  silkscreen extent -0.84,-0.74 0.84,0.74, body extent -0.5,-0.25 0.5,0.25, height 0.55
FP-0679L-MFG [mm]
  rect 1.96x3.15 smd paste+0 mask+0: 1(-2.455,0) 2(2.455,0)
  silkscreen extent -1.1,-1.4 1.1,1.4, body extent -3.05,-1.29 3.05,1.25, height 2.54
FP-0805-L_2_01_0_2-W_1_25-MFG [mm]
  rect 1x1.25 smd paste+0 mask+0: 1(-1,0) 2(1,0)
  silkscreen extent -0.13,-0.72 0.13,0.72, body extent -1,-0.63 1,0.63, height 0.94
FP-455580003-MFG [mm]
  rect 2.75x2.75 hole 1.8 paste-2539.97 mask+0: 1(-4.2,-7.5)
  round 2.75 hole 1.8 paste-2539.97 mask+0: 2(0,-7.5) 3(4.2,-7.5) 4(-4.2,-11.7) 5(0,-11.7) 6(4.2,-11.7)
  round 3 hole 3 unplated paste-2539.97 mask+0: ""(-4.2,-0.2) ""(4.2,-0.2)
  silkscreen extent -7.81,-7.63 7.09,6.78, body extent -7.19,-13.18 7.19,6.88, height 0.25
FP-ABM8-MFG [mm]
  rect 1.3x1.05 smd paste+0 mask+0: 1(-1.15,-0.875) 2(1.15,-0.875) 3(1.15,0.875) 4(-1.15,0.875)
  silkscreen extent -2.5,-1.88 1.7,1.88, body extent -1.9,-1.5 1.9,1.5, height 0.25
FP-BLM15-0_05-MFG [mm]
  rect 0.4x0.5 smd paste+0 mask+0: 1(-0.4,0) 2(0.4,0)
  silkscreen extent -0.53,-0.63 0.52,0.63, body extent -0.5,-0.25 0.5,0.25, height 0.55
FP-C0402-BB-MFG [mm]
  rect 0.52x0.52 smd paste+0 mask+0: 1(-0.4,0) 2(0.4,0)
  silkscreen extent -0.5,-0.64 0.5,0.64, body extent -0.5,-0.25 0.5,0.25, height 0.55
FP-C0805C-DN-MFG [mm]
  rect 0.95x1.35 smd paste+0 mask+0: 1(-0.75,0) 2(0.75,0)
  silkscreen extent -1.1,-1.07 1.1,1.07, body extent -1,-0.63 1,0.63, height 0.88
FP-C1005-050-0_15-0_1-MFG [mm]
  rect 0.4x0.5 smd paste+0 mask+0: 1(-0.4,0) 2(0.4,0)
  silkscreen extent -0.58,-0.63 0.58,0.63, body extent -0.5,-0.25 0.5,0.25, height 0.65
FP-C1005-050-0_15-MFG [mm]
  rect 0.4x0.5 smd paste+0 mask+0: 1(-0.4,0) 2(0.4,0)
  silkscreen extent -0.5,-0.72 0.5,0.72, body extent -0.5,-0.25 0.5,0.25, height 0.55
FP-DG6045C-MFG [mm]
  rect 1.6x5.7 smd paste+0 mask+0: 1(-2.35,0) 2(2.35,0)
  silkscreen extent -3.87,-3.15 1.17,3.15, body extent -3,-3 3,3, height 4.5
FP-ECX-1210-MFG [mm]
  rect 0.575x1.14 smd paste+0 mask+0: 1(-0.413,0) 2(0.413,0)
  silkscreen extent -0.65,-0.95 0.65,0.95, body extent -0.8,-0.67 0.8,0.67, height 0.25
FP-ERJ3EK-IPC_C [mm]
  rect 0.757x0.862 smd paste+0 mask+0: 1(-0.651,0) 2(0.651,0)
  silkscreen extent -1.03,-0.87 1.03,0.87, body extent -1.13,-0.58 1.13,0.58, height 0.25
FP-GRM15-MFG [mm]
  rect 0.4x0.5 smd paste+0 mask+0: 1(-0.4,0) 2(0.4,0)
  silkscreen extent -0.53,-0.63 0.53,0.63, body extent -0.3,-0.16 0.3,0.16, height 0.33
FP-GRM21B-0_2-e0_2_0_7-IPC_B [mm]
  rect 1.255x1.456 smd paste+0 mask+0: 1(-0.826,0) 2(0.826,0)
  silkscreen extent -1.45,-1.13 1.45,1.13, body extent -1,-0.63 1,0.63, height 1.45
FP-KXT331LHS-MFG [mm]
  rect 0.55x1.5 smd paste+0 mask+0: 1(-1.625,0) 2(1.625,0)
  silkscreen extent -1.65,-1.15 1.65,1.15, body extent -2,-1.25 2,1.25, height 0.25
FP-LQFP100-1L-IPC_C [mm]
  rect 1.355x0.212 smd paste+0 mask+0: 1(-7.575,6)
  rrect100% 1.355x0.212 smd paste+0 mask+0: 2(-7.575,5.5) 3(-7.575,5) 4(-7.575,4.5) 5(-7.575,4) 6(-7.575,3.5) 7(-7.575,3) 8(-7.575,2.5) 9(-7.575,2) 10(-7.575,1.5) 11(-7.575,1) 12(-7.575,0.5) 13(-7.575,0) 14(-7.575,-0.5) 15(-7.575,-1) 16(-7.575,-1.5) 17(-7.575,-2) 18(-7.575,-2.5) 19(-7.575,-3) 20(-7.575,-3.5) 21(-7.575,-4) 22(-7.575,-4.5) 23(-7.575,-5) 24(-7.575,-5.5) 25(-7.575,-6) 51(7.575,-6) 52(7.575,-5.5) 53(7.575,-5) 54(7.575,-4.5) 55(7.575,-4) 56(7.575,-3.5) 57(7.575,-3) 58(7.575,-2.5) 59(7.575,-2) 60(7.575,-1.5) 61(7.575,-1) 62(7.575,-0.5) 63(7.575,0) 64(7.575,0.5) 65(7.575,1) 66(7.575,1.5) 67(7.575,2) 68(7.575,2.5) 69(7.575,3) 70(7.575,3.5) 71(7.575,4) 72(7.575,4.5) 73(7.575,5) 74(7.575,5.5) 75(7.575,6)
  rrect100% 0.212x1.355 smd paste+0 mask+0: 26(-6,-7.575) 27(-5.5,-7.575) 28(-5,-7.575) 29(-4.5,-7.575) 30(-4,-7.575) 31(-3.5,-7.575) 32(-3,-7.575) 33(-2.5,-7.575) 34(-2,-7.575) 35(-1.5,-7.575) 36(-1,-7.575) 37(-0.5,-7.575) 38(0,-7.575) 39(0.5,-7.575) 40(1,-7.575) 41(1.5,-7.575) 42(2,-7.575) 43(2.5,-7.575) 44(3,-7.575) 45(3.5,-7.575) 46(4,-7.575) 47(4.5,-7.575) 48(5,-7.575) 49(5.5,-7.575) 50(6,-7.575) 76(6,7.575) 77(5.5,7.575) 78(5,7.575) 79(4.5,7.575) 80(4,7.575) 81(3.5,7.575) 82(3,7.575) 83(2.5,7.575) 84(2,7.575) 85(1.5,7.575) 86(1,7.575) 87(0.5,7.575) 88(0,7.575) 89(-0.5,7.575) 90(-1,7.575) 91(-1.5,7.575) 92(-2,7.575) 93(-2.5,7.575) 94(-3,7.575) 95(-3.5,7.575) 96(-4,7.575) 97(-4.5,7.575) 98(-5,7.575) 99(-5.5,7.575) 100(-6,7.575)
  silkscreen extent -7.7,-6.25 6.25,6.83, body extent -8.35,-8.35 8.35,8.35, height 0.25
FP-SOD-123-IPC_A [mm]
  rect 1.308x0.762 smd paste+0 mask+0: 1(-1.825,0)
  rrect100% 1.308x0.762 smd paste+0 mask+0: 2(1.825,0)
  silkscreen extent -2.39,-0.8 1.35,1.01, body extent -2.98,-1.3 2.98,1.3, height 0.25
FP-SOT89-MFG [mm]
  rect 0.58x1.73 smd paste+0 mask+0: 1(-1.5,-1.635) 3(1.5,-1.635)
  round 1.74 smd paste+0 mask+0: 2(0,0.146)
  Top Layer region: -0.38,-2.5 0.38,-2.5 0.38,-1 0.967,-1 0.967,2.03 -0.967,2.03 -0.967,-1 -0.38,-1 -0.38,-2.5
  silkscreen extent -2.3,-1.3 2.3,1.3, body extent -2.25,-2.3 2.25,1.8, height 1.6
FP-SOT323-3L-MFG [mm]
  rect 0.7x0.42 smd paste+0 mask+0: 1(-1,0.65) 2(-1,-0.65) 3(1,0)
  silkscreen extent -0.67,-1.1 0.67,1.1, body extent -1.05,-1 1.05,1, height 1.1
FP-SRF4532-MFG [mm]
  round 0.99 smd paste+0 mask+0: 1(-2.05,-1.25) 2(2.05,-1.25)
  round 0.97 smd paste+0 mask+0: 3(2.05,1.125) 4(-2.05,1.125)
  Top Layer region: -2.6,0.45 -2.6,1.8 -1.5,1.8 -1.5,0.95 -1.9,0.45
  Top Layer region: 1.5,1.8 2.6,1.8 2.6,0.45 1.9,0.45 1.5,0.95
  Top Layer region: 1.5,-1.8 1.5,-0.95 1.9,-0.45 2.6,-0.45 2.6,-1.8
  Top Layer region: -2.6,-1.8 -2.6,-0.45 -1.9,-0.45 -1.5,-0.95 -1.5,-1.8
  silkscreen extent -2.17,-2.47 1.12,1.7, body extent -2.7,-1.9 2.7,1.9, height 0.25
FP-SSOP6-P-0_65A-MFG [mm]
  rect 0.8x0.4 smd paste+0 mask+0: 1(-0.95,0.65) 2(-0.95,0) 3(-0.95,-0.65) 4(0.95,-0.65) 5(0.95,0) 6(0.95,0.65)
  silkscreen extent -2.05,-1.1 0.18,1.1, body extent -1.05,-1 1.05,1, height 1
FP-TSOT26-MFG [mm]
  rect 1x0.7 smd paste+0 mask+0: 1(-1.099,0.95) 2(-1.099,0) 3(-1.099,-0.95) 4(1.099,-0.95) 5(1.099,0) 6(1.099,0.95)
  silkscreen extent -2.32,-1.5 0.22,1.5, body extent -1.4,-1.45 1.4,1.45, height 1
LM2902Q4T-Footprint-1 [mm]
  rrect25% 0.84x0.26 smd: 1(-1.435,0.75) 2(-1.435,0.25) 3(-1.435,-0.25) 4(-1.435,-0.75) 9(1.435,-0.75) 10(1.435,-0.25) 11(1.435,0.25) 12(1.435,0.75)
  rrect25% 0.26x0.84 smd: 5(-0.75,-1.435) 6(-0.25,-1.435) 7(0.25,-1.435) 8(0.75,-1.435) 13(0.75,1.435) 14(0.25,1.435) 15(-0.25,1.435) 16(-0.75,1.435)
  silkscreen extent -2.09,-1.5 1.5,2.1
MOLX-47219-2001-8_V [mm] "CONN, 8-Leads, Body 14.5x13.6mm, Pitch 1.1mm"
  rect 0.8x1.5 smd: 1(-3.205,1.55) 2(-2.105,1.55) 3(-1.005,1.55) 4(0.095,1.55) 5(1.195,1.55) 6(2.295,1.55) 7(3.395,1.55) 8(4.495,1.55)
  rect 1.45x2 smd: 9(6.875,4.15) 10(6.875,-4.15) 11(-6.875,-4.15) 12(-6.875,4.15)
  silkscreen extent -6.8,-7.8 6.8,7.42, body extent -7.3,-7.79 7.3,6.71, height 1.91
MTC16_L [mm] "TSOP, 16-Leads, Body 5x4.4mm, Pitch 0.65mm, IPC High Density"
  oval 1.4x0.35 smd: 1(-2.8,2.275) 2(-2.8,1.625) 3(-2.8,0.975) 4(-2.8,0.325) 5(-2.8,-0.325) 6(-2.8,-0.975) 7(-2.8,-1.625) 8(-2.8,-2.275) 9(2.8,-2.275) 10(2.8,-1.625) 11(2.8,-0.975) 12(2.8,-0.325) 13(2.8,0.325) 14(2.8,0.975) 15(2.8,1.625) 16(2.8,2.275)
  silkscreen extent -2.92,-2.55 1.7,3.12, body extent -2.25,-2.55 2.25,2.55, height 1.1
NXP-SOT363_L [mm] "SOT23, 6-Leads, Body 2.2x1.35mm, Pitch 0.65mm, IPC High Density"
  rect 0.45x0.35 smd: 1(-0.975,0.65) 2(-0.975,0) 3(-0.975,-0.65) 4(0.975,-0.65) 5(0.975,0) 6(0.975,0.65)
  silkscreen extent -1.1,-1.1 0.35,1.5, body extent -0.67,-1.1 0.67,1.1, height 1.1
ONSC-SOD-123-2-425-04_V [mm] "SOD, 2-Leads, Body 2.69x1.6mm"
  rect 0.91x1.22 smd: 1(-1.635,0) 2(1.635,0)
  silkscreen extent -1.76,-0.8 0.78,1.29, body extent -1.35,-0.8 1.35,0.8, height 1.35
RESC1005X40X25NL05T05 [mm] "Chip Resistor, 2-Leads, Body 1.00x0.50mm, IPC Medium Density"
  rect 0.55x0.55 smd: 1(-0.45,0) 2(0.45,0)
  body extent -0.53,-0.27 0.53,0.28, height 0.4
RESC1608X55X30LL15T15#1 [mm] "Chip Resistor, 2-Leads, Body 1.60x0.80mm, IPC High Density"
  rect 0.7x0.85 smd: 1(-0.625,0) 2(0.625,0)
  body extent -0.87,-0.48 0.87,0.48, height 0.55
RESC1608X55X30LL15T15#2 [mm] "Chip Resistor, 2-Leads, Body 1.75x0.95mm, IPC High Density"
  rect 0.75x0.85 smd: 1(-0.65,0) 2(0.65,0)
  body extent -0.87,-0.48 0.87,0.48, height 0.55
RESC1608X55X30ML15T15 [mm] "Chip Resistor, 2-Leads, Body 1.60x0.80mm, IPC Low Density"
  rect 0.9x1.05 smd: 1(-0.725,0) 2(0.725,0)
  body extent -0.87,-0.48 0.87,0.48, height 0.55
RESC1608X55X30NL15T15 [mm] "Chip Resistor, 2-Leads, Body 1.60x0.80mm, IPC Medium Density"
  rect 0.8x0.95 smd: 1(-0.675,0) 2(0.675,0)
  body extent -0.87,-0.48 0.87,0.48, height 0.55
RESC1609X55X30LL15T15 [mm] "Chip Resistor, 2-Leads, Body 1.75x0.95mm, IPC High Density"
  rect 0.75x0.85 smd: 1(-0.65,0) 2(0.65,0)
  body extent -0.87,-0.48 0.87,0.48, height 0.55
RESC1609X55X30ML15T15 [mm] "Chip Resistor, 2-Leads, Body 1.75x0.95mm, IPC Low Density"
  rect 1.15x1.05 smd: 1(-0.85,0) 2(0.85,0)
  body extent -0.87,-0.48 0.87,0.48, height 0.55
SISH615ADN-T1-GE3-Footprint-1 [mm]
  rect 0.35x0.5 smd paste+0 mask+0: 1(-0.937,-1.4) 2(-0.288,-1.4) 3(0.363,-1.4) 4(1.012,-1.4)
  round 0.025 smd: 5-6-7-8(0.038,0.51)
  Top Layer region: -1.187,-0.63 -1.187,-0.215 -1.568,-0.215 -1.568,0.215 -1.187,0.215 -1.187,1.35 -1.137,1.35 -1.137,1.65 -0.737,1.65 -0.737,1.35 -0.487,1.35 -0.487,1.65 -0.088,1.65 -0.088,1.35 0.163,1.35 0.163,1.65 0.563,1.65 0.563,1.35 0.813,1.35 0.813,1.65 1.212,1.65 1.212,1.35 1.262,1.35 1.262,0.215 1.643,0.215 1.643,-0.215 1.262,-0.215 1.262,-0.63
  silkscreen extent -1.51,-2.37 1.59,-1.01, body extent -1.51,-1.6 1.59,1.6, height 0.9
SMTC-TSW-104-08-L-D_V [mm] "CONN, 8-Leads, Body 10.16x5.08mm, Pitch 2.54mm"
  rect 1.55x1.55 hole 1.02: 1(-3.81,-1.27)
  round 1.55 hole 1.02: 2(-3.81,1.27) 3(-1.27,-1.27) 4(-1.27,1.27) 5(1.27,-1.27) 6(1.27,1.27) 7(3.81,-1.27) 8(3.81,1.27)
  silkscreen extent -5.85,-2.54 5.08,2.54, body extent -5.08,-2.54 5.08,2.54, height 8.38
TCAN1146DYYRQ1-Footprint-1 [mil]
  rect 38.5x12 smd paste+0 mask+0: 1(-60.75,59.07) 2(-60.75,39.38) 3(-60.75,19.69) 4(-60.75,0) 5(-60.75,-19.69) 6(-60.75,-39.38) 7(-60.75,-59.07) 8(60.75,-59.07) 9(60.75,-39.38) 10(60.75,-19.69) 11(60.75,0) 12(60.75,19.69) 13(60.75,39.38) 14(60.75,59.07)
  silkscreen extent -47,-90 100,90, body extent -66,-84 66,84, height 43
TP06R [mm] "Testpoint, round, d=0.6mm"
  round 0.6 smd paste-1: 1(0,0)
WL-SBCD_0606 [mm] "SMT Bi-color Chip LED Diffuesed, body 1.5x1.6mm"
  rect 0.5x0.8 smd: 1(-0.45,0.8) 2(-0.45,-0.8) 3(0.45,-0.8) 4(0.45,0.8)
  silkscreen extent -0.08,1.48 0.07,1.62, body extent -0.75,-0.8 0.75,0.8, height 0.55

## Part data
C1 C3 C4 C5 C6 C7 C8 C9 C10 C14 C15 C16 C17 C18 C19 C20 C21 C23 C25 C39 C41 C44 C45 C48: library part CMP-2008-02046-2, "CAP CER 0.1UF 10V X5R 0402", Capacitance="0.10 μF", Manufacturer=Kemet, Package=C0402-BB, Temperature="-55°C to +125°C", Temperature Characteristic=X5R, Temperature Coefficient=15%, Temperature Range High=+125°C, Temperature Range Low=-55°C, Tolerance=0.1, Voltage Rating="10 V", Automotive=No, Category=Cap, ComponentLink2Description=Datasheet, ComponentLink2URL=https://content.kemet.com/datasheets/KEM_C1002_X7R_SMD.pdf, Device Class L1="Passive Components", Device Class L2=Capacitors, Device Class L3="Ceramic Capacitors", Digikey Description="CAP CER 0.1UF 10V X5R 0402", Height=0.55mm, Ipc Land Pattern Name=CAPC10050X50, Lead Free=Yes, Manufacturer Part Number=C0402C104K8PACTU, Material=Ceramic, Mouser Description="Capacitor 100 nF 10 VDC 0402", Octopart=https://octopart.com/c0402c104k8pactu-kemet-140039, RoHS=TRUE
C2 C24 C26 C27 C28 C30 C32 C34 C36 C38: library part CMP-2100-03641-2, "CAP CER 0.1UF 16V X7R 0402", Capacitance=0.10μF, Manufacturer=Murata, Package=GRM15, Temperature="-55°C to +125°C", Temperature Characteristic=X7R, Temperature Range High=+125°C, Temperature Range Low=-55°C, Tolerance=10%, Voltage Rating=16Vdc, Category=Cap, ComponentLink2Description=Datasheet, ComponentLink2URL=https://search.murata.co.jp/Ceramy/image/img/A01X/G101/ENG/GRM155R71H471KA01-01A.pdf, Device Class L1="Passive Components", Device Class L2=Capacitors, Device Class L3="Ceramic Capacitors", Digikey Description="CAP CER 0.1UF 16V X7R 0402", Height=0.55mm, Ipc Land Pattern Name=CAPC10050X219, Lead Free=yes, Manufacturer Part Number=GRM155R71C104KA88D, Material=Ceramic, Mouser Description="0402 0.1 uF 16V ±10 % Tolerance X7R SMT Multilayer Ceramic Capacitor", Octopart=https://octopart.com/grm155r71c104ka88d-murata-196880, RoHS=TRUE, Standoff Height=0mm
C11 C40: library part CMP-1036-04819-2, Manufacturer=Kemet, Part Number=C0805C225K9PACTU
C12 C13: library part CMP-2007-03222-3, "Chip Multilayer Ceramic Capacitors for General Purpose, 0805, 22uF, X5R, 15%, 20%, 25V", Capacitance=22uF, Case Code (Imperial)=0805, Case Code (Metric)=2012, Dielectric=X5R, Max Operating Temperature=85°C, Min Operating Temperature=-55°C, Package Quantity=3000, Resistor Type=Ceramic, Tolerance=20%, Voltage=25V, Case/Package=0805, Depth=1.25mm, Height=1.25mm, Lead Free="Lead Free", Length=2mm, Material=Ceramic, Mount="Surface Mount", Packaging="Tape and Reel", REACH SVHC="No SVHC", Termination=SMD/SMT, Thickness=0.057inch, Voltage Rating=25V, Voltage Rating (DC)=25V, Weight=0.000335oz, Width=1.25mm
C22: library part CMP-2000-05997-2, "CAP CER 4.7UF 10V X5R 0402", Capacitance=4.7uF, Case Code (Imperial)=0402, Case Code (Metric)=1005, Dielectric=X5R, Dielectric Material=Ceramic, Max Operating Temperature=85°C, Min Operating Temperature=-55°C, Package Quantity=10000, Tolerance=10%, Voltage Rating=10V, Case/Package=0402, Lead Free="Lead Free", Length=0.039inch, Mount="Surface Mount", Packaging="Cut Tape", REACH SVHC="No SVHC", RoHS Compliant=Yes, Series=C, Thickness=0.022inch, Voltage Rating (DC)=10V, Width=0.02inch
C29 C35 C37: library part CMP-14477-000104-2, "None", Capacitance=1uF, Case Code (Imperial)=0402, Case Code (Metric)=1005, Dielectric=X5R, Max Operating Temperature=85°C, Min Operating Temperature=-55°C, Package Quantity=1, Tolerance=10%, Voltage Rating=16V, Case/Package=0402, Construction=Flat, Depth=0.5mm, Halogen Free="Halogen Free", Height=0.5mm, Length=1mm, Mount="Surface Mount", Number of Pins=2, Packaging="Tape and Reel", Radiation Hardening=No, RoHS Compliant=Yes, Series=M, Termination=SMD/SMT, Thickness=0.022inch, Voltage Rating (DC)=16V, Width=0.02inch
C31 C33: library part CMP-08246-004344-1, "CAP CER 2.2UF 10V X7S 0402", Capacitance=2.2uF, Case Code (Imperial)=0402, Case Code (Metric)=1005, Dielectric=X7S, Dielectric Material=Ceramic, Max Operating Temperature=125°C, Min Operating Temperature=-55°C, Package Quantity=1, Tolerance=10%, Voltage Rating=10V, Case/Package=0402, Depth=0.5mm, Height=0.5mm, Lead Free="Lead Free", Length=1mm, Mount="Surface Mount", Packaging="Tape and Reel", Resistor Type=Ceramic, RoHS Compliant=Yes, Series=C, Termination=SMD/SMT, Thickness=0.022inch, Voltage Rating (DC)=10V, Weight=2.3E-05oz, Width=0.02inch
C42 C43: library part CMP-1036-00709-3, "General Purpose Ceramic Capacitor, 0805, 6.8pF, 0.25pF, C0G, 30ppm/°C, 100V", Capacitance=6.8pF, Case Code (Imperial)=0805, Case Code (Metric)=2012, Dielectric=C0G, Dielectric Material=Ceramic, Insulation Resistance=100GR, Max Operating Temperature=125°C, Min Operating Temperature=-55°C, Package Quantity=1, Temperature Coefficient=0ppm/°C, Tolerance=5%, Voltage=100V, Case/Package=0805, Construction=Flat, Contact Plating=Tin, Depth=1.25mm, Dissipation Factor=10%, Height=0.71mm, Lead Free="Lead Free", Length=2.01mm, Mount="Surface Mount", Number of Pins=2, Packaging="Tape and Reel", Radiation Hardening=No, REACH SVHC="No SVHC", RoHS Compliant=Yes, Series=-, Termination=SMD/SMT, Thickness=0.037inch, Voltage Rating=100V, Voltage Rating (DC)=100V, Width=0.049inch
C46 C47: library part CMP-2007-00302-2, "CAP CER 18PF 50V C0G/NP0 0805", Capacitance="18 pF", Manufacturer=KEMET, Package=C0805C-DN, Temperature="-55°C to +125°C", Temperature Characteristic=C0G, Temperature Coefficient=30ppm/°C, Temperature Range High=+125°C, Temperature Range Low=-55°C, Tolerance=0.05, Voltage Rating="50 V", Automotive=No, Category=Cap, ComponentLink2Description=Datasheet, ComponentLink2URL=https://content.kemet.com/datasheets/KEM_C1003_C0G_SMD.pdf, Device Class L1="Passive Components", Device Class L2=Capacitors, Device Class L3="Ceramic Capacitors", Digikey Description="CAP CER 18PF 50V C0G/NP0 0805", Height=0.88mm, Ipc Land Pattern Name=CAPC200125X78, Lead Free=Yes, Manufacturer Part Number=C0805C180J5GACTU, Material=Ceramic, Mouser Description="Cap Ceramic 18pF 50V C0G 5% SMD 0805 125C Paper T/R", Octopart=https://octopart.com/c0805c180j5gactu-kemet-144810, RoHS=TRUE
D1 D2 D5 D7: library part CMP-2000-04993-2, "DIODE GEN PURP 100V 150MA SOD123", Average Rectified Current=150mA, Capacitance=4pF, Forward Voltage=1V, Max Forward Surge Current (Ifsm)=1A, Max Operating Temperature=150°C, Max Repetitive Reverse Voltage (Vrrm)=100V, Max Reverse Leakage Current=5uA, Max Surge Current=2A, Min Operating Temperature=-65°C, Package Quantity=3000, Power Dissipation=400mW, Current Rating=150mA, Element Configuration=Single, Forward Current=150mA, Height=1.2mm, Lead Free="Lead Free", Length=2.85mm, Max Reverse Voltage (DC)=100V, Mount="Surface Mount", Number of Pins=2, Output Current=150mA, Packaging="Tape and Reel", Peak Non-Repetitive Surge Current=2A, Polarity=Standard, Radiation Hardening=No, Recovery Time=4ns, Reverse Recovery Time=4ns, Voltage Rating (DC)=100V, Width=1.8mm
D3 D9 D10 D11 D12: library part CMP-004-00034-2, "Led, Red/Grn, 180Mcd/230Mcd, 624Nm/525Nm Rohs Compliant: Yes"
D4 D8: library part CMP-12225-000055-1, "TVS DIODE 26.5V 44V SOT323-3", Breakdown Voltage=28.5V, Capacitance=3pF, Clamping Voltage=44V, Manufacturer=STMicroelectronics, Max Junction Temp=+175°C, Package=SOT323-3L, Peak Pulse Current=3A, Peak Pulse Power=170W, Reverse Standoff Voltage=26.5V, Temperature="-55°C to +175°C", Temperature Range Low=-55°C, Automotive=Yes, Automotive Grade="Grade 0", Category=Diode, ComponentLink2Description=Datasheet, ComponentLink2URL=https://www.st.com/resource/en/datasheet/esdcan02-2bwy.pdf, Device Class L1="Circuit Protection", Device Class L2="TVS Diodes", Device Class L3=unset, Digikey Description="TVS DIODE 26.5V 44V SOT323-3", Direction=Bidirectional, Height=1.1mm, Ipc Land Pattern Name=SOT65P210X95-3, Lead Free=Yes, Manufacturer Part Number=ESDCAN02-2BWY, Mouser Description="TVS Diodes / ESD Suppressors Automotive dual-line Transil, Transient voltage suppressor (TVS) for CAN bus", Number of Channels=2, Octopart=https://octopart.com/esdcan02-2bwy-stmicroelectronics-58631133, RoHS=TRUE, Standoff Height=0mm, Temperature Range High=+175°C
D6: library part CMP-1060-00565-1, "Zener Voltage Regulator, 500 mW, 2-Pin SOD-123, Pb-Free, Tape and Reel", Manufacturer="On Semiconductor", ComponentLink1Description="Manufacturer URL", ComponentLink1URL=http://www.onsemi.com/, ComponentLink2Description=Datasheet, ComponentLink2URL=http://www.onsemi.com/pub_link/Collateral/MMSZ5221BT1-D.PDF, ComponentLink3Description="Package Specification", ComponentLink3URL=http://www.onsemi.com/pub_link/Collateral/425-04.PDF, DatasheetVersion="Rev. 12", Mounting Technology="Surface Mount", P Max (W)=0.5, PackageDescription="2-Pin SOD, Body 1.6 x 2.69 mm", PackageReference=SOD-123-2-425-04, PackageVersion="Rev. G, 10/2009", Packing="Tape and Reel", PartNumber=MMSZ5242BT1G, RoHS=Pb-Free, VZ Typ (V)=12
F1: library part CMP-16042-000002-1, "DIFF P#!!! /  / FUSE BRD MNT 1A 125VAC/VDC", Fuse Current=15A, Fuse Interrupt Ac Current=50A, Fuse Interrupt Dc Current=300A, Fuse Voltage Drop=0.13V, Manufacturer="Bel Fuse", Manufacturer Part Number=0679L9150-01, Max Fuse Ac Voltage=125V, Package=0679L, Resistance=0.0038Ω, Temperature="-55°C to +125°C", Temperature Range High=+125°C, Temperature Range Low=-55°C, Automotive=Yes, Automotive Grade="Grade 1", Category=Fuse, ComponentLink2Description=Datasheet, ComponentLink2URL=https://www.belfuse.com/resources/CircuitProtection/datasheets/0679L%20Sep2016.pdf, Device Class L1="Circuit Protection", Device Class L2=Fuses, Device Class L3=unset, Digikey Description="FUSE BRD MNT 15A 125VAC/VDC", Fuse Blow Speed=Fast, Fuse I2T=103.5A2Sec, Height=2.79mm, Ipc Land Pattern Name=CAPC610254X254, Lead Free=Yes, Max Fuse Dc Voltage=125V, Octopart=https://octopart.com/0679l9150-01-bel+fuse-70850665, RoHS=TRUE, Voltage Rating=125V
FB1: library part CMP-0686-00252-4, "Chip Ferrite Bead, 0402, 600Ω @ 100MHz, 0.23Ω, 25%, 900mA", Case Code (Imperial)=0402, Case Code (Metric)=1005, Current Rating=900mA, DC Resistance (DCR)=230mR, Max Operating Temperature=125°C, Min Operating Temperature=-55°C, Package Quantity=10000, Test Frequency=100MHz, Tolerance=25%, Case/Package=0402, Height=0.5mm, Impedance=600R, Lead Free="Lead Free", Length=1mm, Material=Steel, Max Current Rating=900mA, Max DC Current=900mA, Number of Circuits=1, Number of Lines=1, Number of Pins=2, Packaging="Tape and Reel", Termination=SMD/SMT, Width=0.5mm
J1 J2: library part CMP-04776-000024-1, "CONN HEADER R/A 6POS 4.2MM", Current Rating=8A, Manufacturer=Molex, Package=0, Temperature="-40°C to +105°C", Temperature Range High=+105°C, Temperature Range Low=-40°C, Voltage Rating=600V, Automotive=No, Category=Conn, ComponentLink2Description=Datasheet, ComponentLink2URL=https://www.molex.com/webdocs/datasheets/pdf/en-us/0455580003_PCB_HEADERS.pdf, Conn Gender=Male, Conn Orientation="Right Angle", Contact Material=Tin,Nickel, Device Class L1=Connectors, Device Class L2="Headers and Wire Housings", Device Class L3=unset, Digikey Description="CONN HEADER R/A 6POS 4.2MM", Footprint Url=https://www.molex.com/pdm_docs/sd/455580003_sd.pdf, Height=10.38mm, Lead Free=Yes, Manufacturer Part Number=455580003, Mouser Description="Conn Power HDR 6 POS 4.2mm Solder ST Thru-Hole 6 Terminal 1 Port Mini-Fit Jr™ Tray", Number of Contacts=6, Number of Rows=2, Octopart=https://octopart.com/45558-0003-molex-7672845, Pitch=4.2mm, RoHS=TRUE, Standoff Height=0.4mm
J3: library part CMP-002-00075-1, "CONN HEADER SMD 10POS 1.27MM (specifically compatible with J-Link EDU cable) PN: 3220-10-0300-00"
L1 L3: library part CMP-07251-000006-1, "CMC 51UH 200MA 2LN 2KOHM SMD", Case/Package=4532, Current=200mA, DC Resistance (DCR)=3.5R, Inductance=51uH, Insulation Resistance=10MR, Max Operating Temperature=125°C, Min Operating Temperature=-40°C, Package Quantity=1, Resistance=2kR, Self Resonant Frequency=100kHz, Tolerance=50%, Voltage Rating (DC)=50V, Contact Plating=Tin, Core Material=Ferrite, Current Rating=200mA, DC Current=200mA, Depth=3.4mm, Element Configuration=Dual, Height=0.118inch, Impedance=2kR, Lead Free="Lead Free", Length=4.5mm, Material=Steel, Max DC Current=200mA, Mount="Surface Mount", Number of Lines=2, Packaging="Tape and Reel", REACH SVHC="No SVHC", RoHS Compliant=Yes, Series=SRF4532, Termination=SMD/SMT, Test Frequency=100kHz, Width=0.126inch
L2: library part CMP-06042-002684-1, "Shielded Wirewound Inductor 3.9uH 30% 4200mA 0.0264Ω SMD", Case/Package=Nonstandard, Current Rating=4.2A, DC Resistance (DCR)=26.4mR, Inductance=3.9uH, Max Operating Temperature=85°C, Min Operating Temperature=-40°C, Resistor Type=Wirewound, Saturation Current=4.7A, Test Frequency=100kHz, Tolerance=30%, Core Material=Ferrite, Height - Seated (Max)=0.177inch, Length=0.248inch, Mount="Surface Mount", Packaging="Tape and Reel", Shielding=Shielded, Width=0.248inch
LS1: library part CMP-00027-00003-1, "Audio Indicator 12V 12mA 110dBA 3.5KHz Resonant Frequency Thru-Hole"
P1 P2: library part CMP-1681-00006-4, "Male Header, Pitch 2.54 mm, 2 x 4 Position, Height 8.38 mm, Tail Length 5.08 mm, -55 to 125 degC, RoHS, Bulk", Colour=Black, Current Rating="7.6 A", Manufacturer=Samtec, Package Quantity=1, Voltage Rating="550 V", ComponentLink1Description="Manufacturer URL", ComponentLink1URL=http://www.samtec.com/, ComponentLink2Description=Datasheet, ComponentLink2URL=https://datasheet.ciiva.com/25616/0900766b81154476-25616879.pdf, ComponentLink3Description="Package Specification", ComponentLink3URL=http://suddendocs.samtec.com/prints/tsw-xxx-xx-x-x-xx-xxx-footprint.pdf, Contact Finish=Gold, Contact Material=Bronze, Contact Plating=Gold, DatasheetVersion=04/2012, Lead Pitch="0.1 inch", Mount="Through Hole", Mounting Technology="Through Hole", PackageDescription="Male Header, Pitch 2.54 mm, 2 x 4 Position, Height 8.38 mm, Tail Length 5.08 mm", PackageReference=TSW-104-08-L-D, Packaging=Bulk, Pins=8, REACH SVHC="No SVHC", RoHSCompliant=true, Rows=2
Q1 Q2: library part CMP-013-00036-2, "Trans MOSFET P-CH 20V 22.1A 8-Pin PowerPAK 1212 EP T/R"
Q3: library part CMP-35916-000009-1, "MOSFET 2N-CH 60V 0.3A", Continuous Drain Current (ID)=300mA, Drain to Source Voltage (Vdss)=60V, Input Capacitance=40pF, Max Power Dissipation=285mW, FET Type="2 N-Channel", Mount="Surface Mount", Packaging="Tape and Reel", Rds On Max=1.5R
Q4 Q5 Q8 Q9: library part CMP-2000-06170-1, "P-Channel Enhancement Mode MOSFET, 310 mW, 20 V, -55 to 150 degC, 3-Pin SOT-323, RoHS, Tape and Reel", Drain-Source On Resistance-Max=750mO, Drain-to-Source Voltage [Vdss]=20V, Manufacturer="Diodes Inc", Package Description="3-Pin Small Outline Transistor, Body 2 x 1.25 mm, Pitch 0.65 mm", Package Reference=SOT323, Rated Power Dissipation=310mW, Channel Type=P-Channel, Datasheet URL=http://www.diodes.com/_files/datasheets/ds31861.pdf, Datasheet Version="Rev. 3-2, 09/2013", Manufacturer URL=http://www.diodes.com/, Mounting Technology=SurfaceMount, Qg Gate Charge=0.622nC
Q6 Q7 Q10 Q11 Q14: library part CMP-2000-05968-1, "N-Channel Enhancement Mode Mosfet, 50 V, 200 mA, -55 to 150 degC, 6-Pin SOT-323, RoHS, Tape and Reel", Id - Continuous Drain Current=200mA, Manufacturer=DiodesIncorporated, Maximum Operating Temperature=+150C, Minimum Operating Temperature=-55C, Package / Case=SOT-323-3, Package Description="3-Pin Small Outline Transistor, Body 2 x 1.25 mm, Pitch 0.65 mm", Package Reference=SOT323, Pd - Power Dissipation=200mW, Rds On - Drain-Source Resistance=1.4Ohms, Vds - Drain-Source Breakdown Voltage=75V, Vgs - Gate-Source Voltage=20V, Brand=DiodesIncorporated, Channel Mode=Enhancement, Configuration=Single, Datasheet URL=http://www.diodes.com/_files/datasheets/ds30206.pdf, Datasheet Version="Rev. 11-2, 09/2013", Factory Pack Quantity=3000, Forward Transconductance - Min=0.1S, Height=1mm, Length=2.2mm, Manufacturer URL=http://www.diodes.com/, Mounting Style=SMD/SMT, Mounting Technology=SurfaceMount, Number of Channels=1Channel, Packaging=Reel, Product=MOSFETSmallSignal, Product Category=MOSFET, RoHS=True, Series=BSS138, Technology=Si, Transistor Polarity=N-Channel, Transistor Type=1N-Channel, Type=EnhancementModeFieldEffectTransistor, Typical Turn-Off Delay Time=20ns, Typical Turn-On Delay Time=20ns, Unit Weight=0.000212oz, Width=1.35mm
Q12 Q13 Q15: library part CMP-1259-00116-1, "Dual P-Channel Trench MOSFET, -50 V, -0.16 A, -55 to 150 degC, 6-Pin SOT363, Tape and Reel", Manufacturer="NXP Semiconductors", Automotive Qualified=Y, Channel Type=P, Code_JEITA=SC-88, ComponentLink1Description="Manufacturer URL", ComponentLink1URL=http://www.nxp.com/, ComponentLink2Description=Datasheet, ComponentLink2URL=http://www.nxp.com/documents/data_sheet/BSS84AKS.pdf, ComponentLink3Description="Package Specification", ComponentLink3URL=http://www.nxp.com/documents/outline_drawing/sot363_po.pdf, DatasheetVersion="Rev. 1", ID [max] (A)=-0.16, IDM [max] (A)=-0.64, Mounting Technology="Surface Mount", PackageDescription="6-Pin Small Outline Transistor Package, Body 2 x 1.25 mm, Pitch 0.65 mm", PackageReference=SOT363, PackageVersion="06-03-16, 03/2006", Packing="Tape & Reel", PartNumber=BSS84AKS,115, VDS [max] (V)=-50, VGSth [typ] (V)=-1.6
R1 R2 R3 R4 R5 R7 R10 R15 R18 R20 R23 R25 R30 R31 R34 R35 R37 R40 R42 R43 R47 R48 R58 R59 R62 R63 R64 R65 R74 R75 R78 R79 R80 R81 R82 R83 R84 R88 R90 R91 R92 R93 R95: library part CMP-1012-00623-3, "Chip Resistor, 10 KOhm, +/- 1%, 0.1 W, -55 to 155 degC, 0603 (1608 Metric), RoHS, Tape and Reel", Case Code (Imperial)=0603, Case Code (Metric)=1608, Manufacturer=Panasonic, Max Operating Temperature=155degC, Max Power Dissipation=100mW, Min Operating Temperature=-55degC, Package Description="2-Pin Surface Mount Device, Body 1.6 x 0.85 mm", Package Quantity=1, Package Reference=603, Resistance=10KOhm, Temperature Coefficient=100ppm\/degreesC, Tolerance=1%, Voltage Rating=75V, Case\/Package=0603, Composition=ThickFilm, Contact Plating=Tin, Datasheet URL=https://industrial.panasonic.com/cdbs/www-data/pdf/RDA0000/AOA0000C304.pdf, Datasheet Version=02/2017, Depth=0.8mm, Height=0.45mm, Lead Free=LeadFree, Length=1.6mm, Manufacturer URL=http://www.panasonic.com/, Military Standard=Not, Mount=SurfaceMount, Mounting Technology=SurfaceMount, Number of Pins=2, Number of Terminations=2, Packaging=TapeandReel, Power Rating=100mW, Radiation Hardening=No, REACH SVHC=NoSVHC, RoHSCompliant=true, Termination=SMD/SMT, Voltage Rating (DC)=75V, Width=0.031inch
R6 R12 R27 R32 R36 R39 R56 R57 R60 R61 R72 R73 R76 R77 R86 R89 R94 R97: library part CMP-2000-00180-1, Manufacturer=Panasonic, Part Number=ERJ-3EKF1001V
R8 R24 R33 R38 R41 R49 R85 R87 R96 R98: library part CMP-2000-00572-1, Manufacturer=Panasonic, Part Number=ERJ3EKF56R0V
R9 R13 R26 R29: library part CMP-1012-00372-3, "RES SMD 60.4 OHM 1% 1/10W 0603", Case Code (Imperial)=0603, Case Code (Metric)=1608, Max Operating Temperature=155°C, Max Power Dissipation=100mW, Min Operating Temperature=-55°C, Package Quantity=1, Resistance=60.4R, Resistance Tolerance=1%, Resistor Type="Thick Film", Temperature Coefficient=100ppm/°C, Voltage Rating=75V, Voltage Rating (DC)=50V, Case/Package=0603, Construction=Rectangular, Contact Plating=Tin, Depth=0.8mm, Features="Automotive AEC-Q200", Height=0.022inch, Lead Free="Lead Free", Length=1.6mm, Military Standard=Not, Mount="Surface Mount", Number of Terminations=2, Packaging="Tape and Reel", Power Rating=100mW, REACH SVHC="No SVHC", RoHS Compliant=Yes, Series=ERJ, Termination=SMD/SMT, Tolerance=1%, Width=0.031inch